# Allegro board democ2.brd
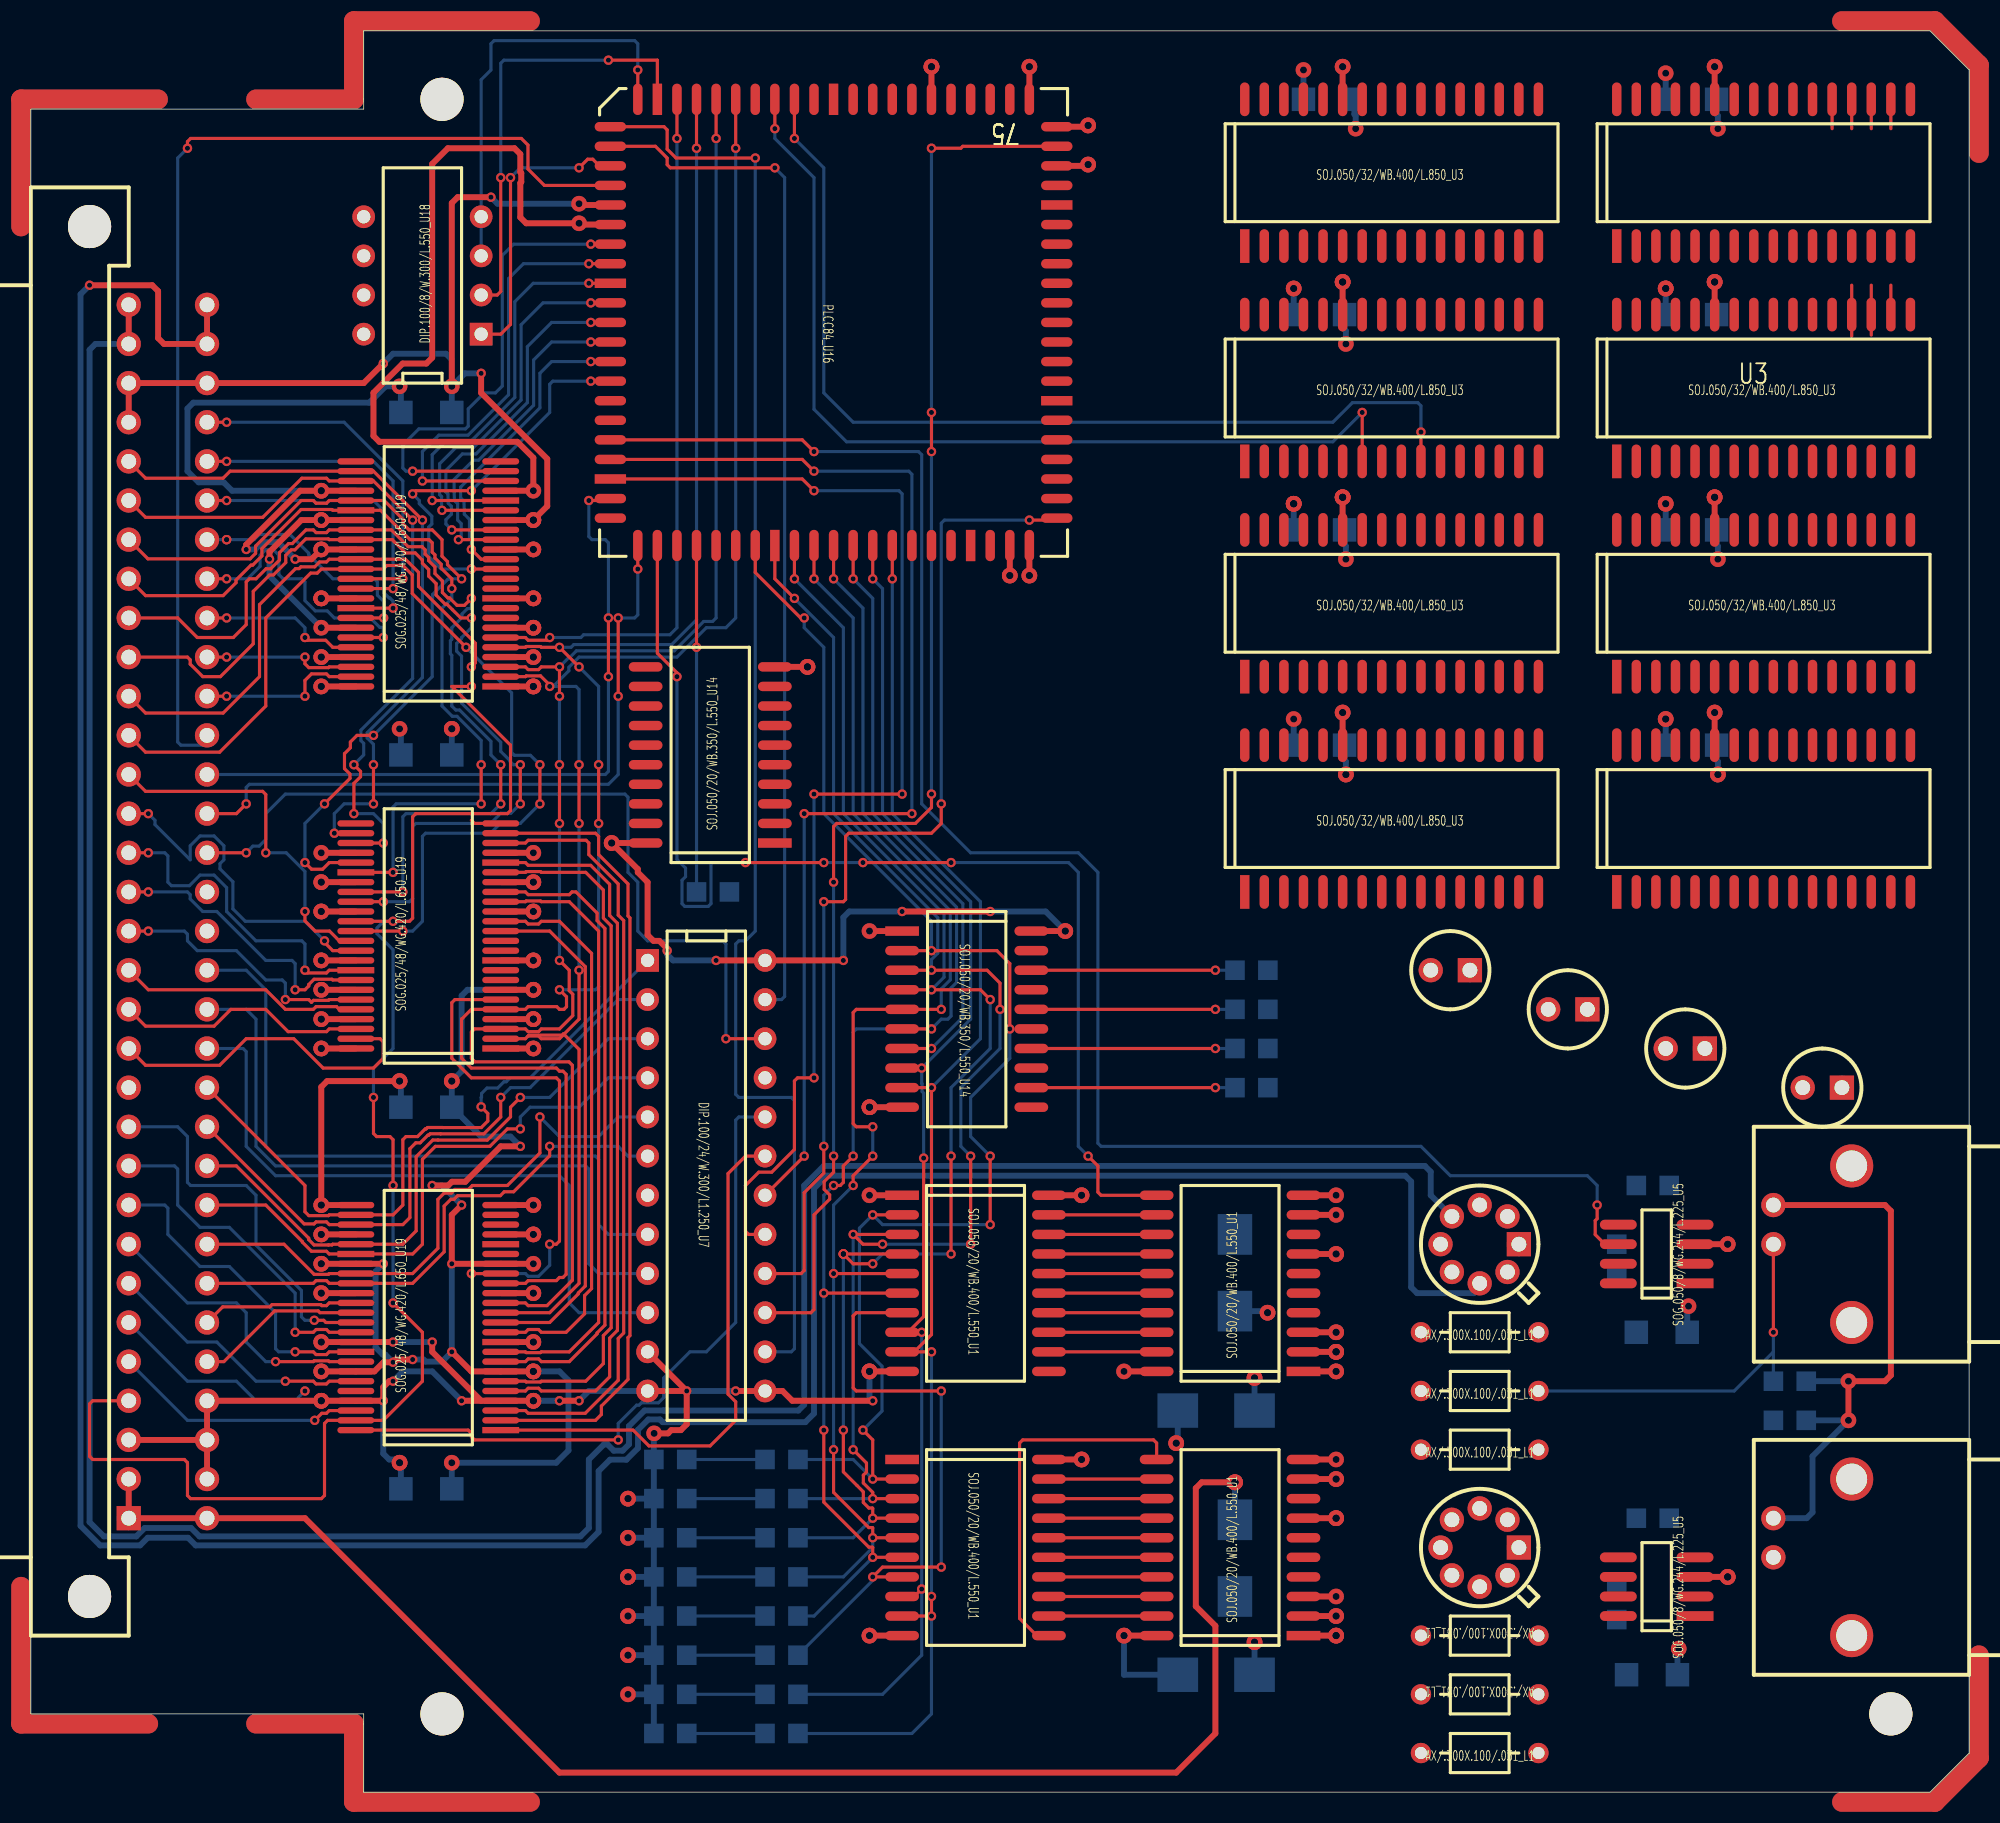
[diagram p0: board, top side]
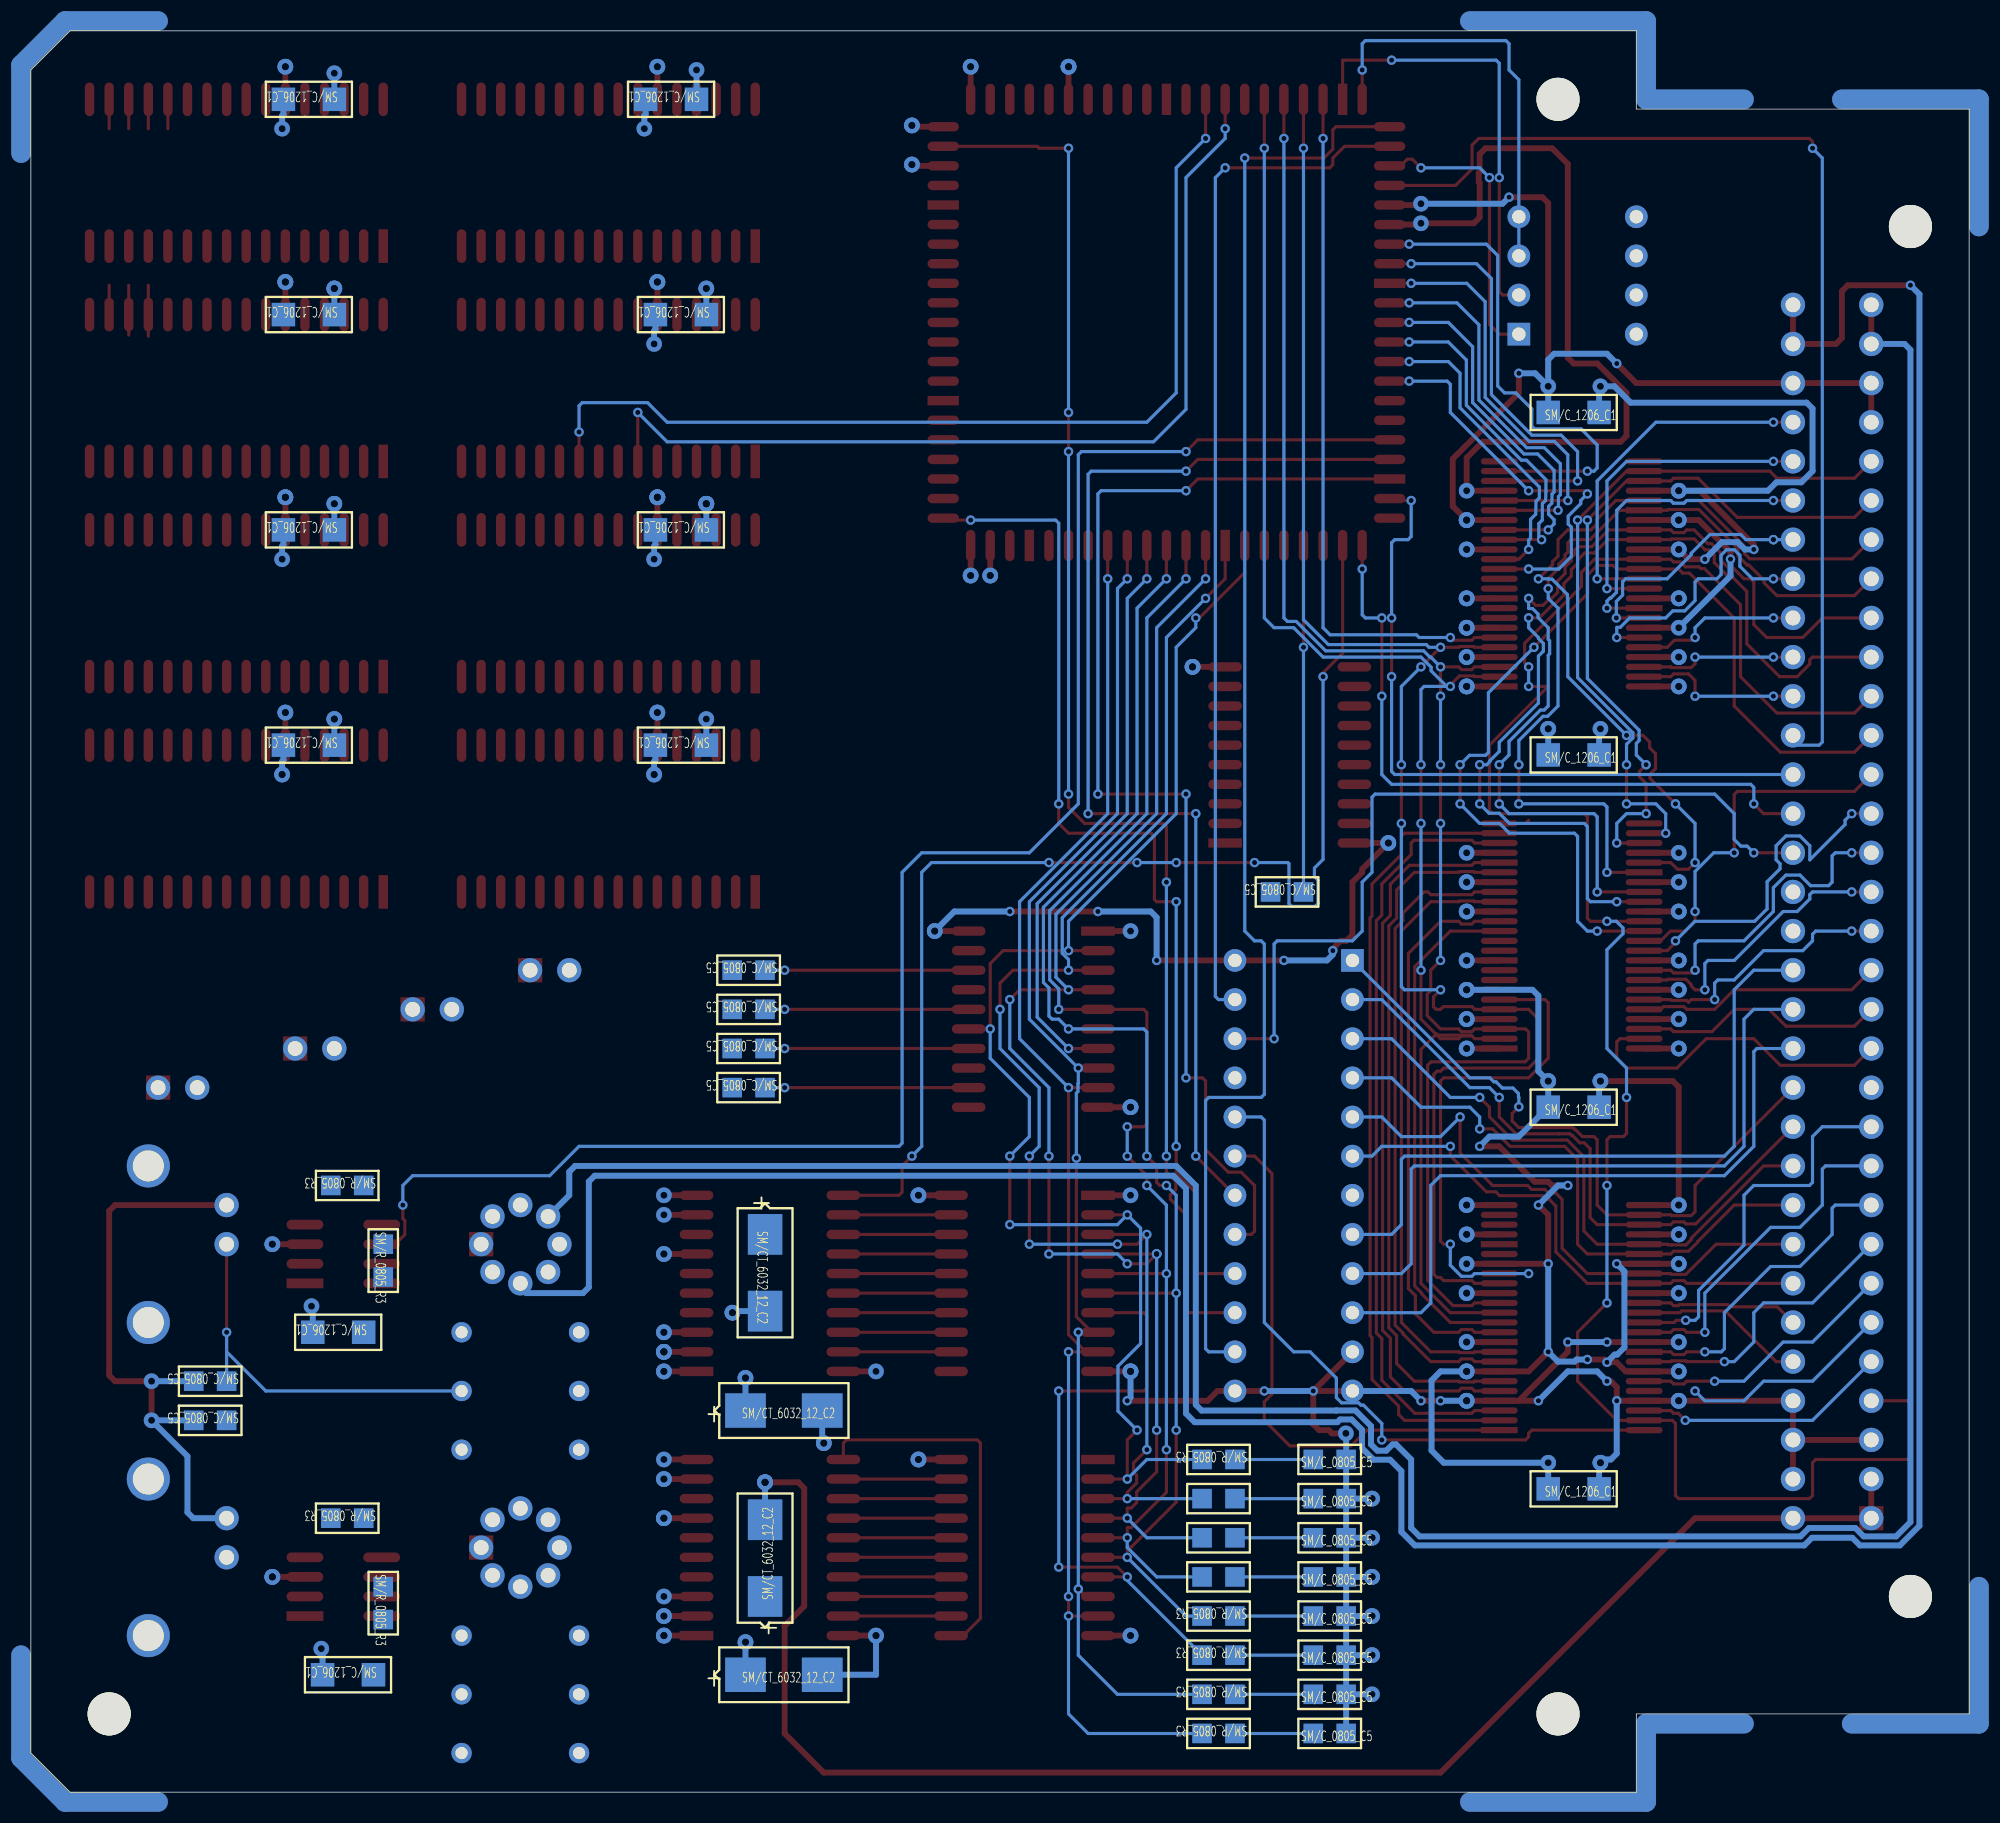
[diagram p1: board, bottom side, seen from below]

Outline 125.73 x 114.3 mm; copper layers: TOP, GND, POWER, BOTTOM. Coordinates in mm from the lower left corner of the outline.
Outline path: 0,109.22 21.59,109.22 21.59,114.3 123.19,114.3 125.73,111.76 125.73,2.54 123.19,0 21.59,0 21.59,5.08 0,5.08 0,109.22

## Design rules (mm)
nets with their own width: min track width 0.203; nets A0 A1 A2 A3 A4 A5 A6 A7 A8 A9 A10 A11 A12 A13 A14 A15 A16 A17 A18 A19 A20 A21 A22 A23 AEN/ BA0 BA1 BA2 BA3 BD0 BD1 BD2 BD3 BD4 BD5 BD6 BD7 BD8 BD9 BD10 BD11 BD12 BD13 BD14 BD15 BRD/ BRESET BWR/ D0 D1 D2 D3 D4 D5 D6 D7 D9 D10 D11 D12 D13 D14 D15 DDIR DEN/ DHEN/ FPGA/ GAIN HS/ MCLK MRD/ MWR/ N00036 N00036_6360 N00038 N00038_6372 N00044 N00044_6366 N00046 N00046_6362 N00048 N00048_6359 N00060 N00060_6368 N00306 N00318 N00322 N00671 N00689 N00703 N00717 N00827 N00831 N00835 N00837 N04966 N05690 N05692 N05694 N05696 N05698 N05700 N05702 N05704 N11940 N11950 N11984 N11994 N12004 N19706 N19710 N19714 N19718 N19934 N19938 N19942 N23417 N23878 N24816 N24821 N24826 N84247 N103899 N255822 N314771 N315146 N315333 N320476 N336036 N336041 OUTA OUTC RA0 RA1 RA2 RA3 RA4 RA5 RA6 RA7 RA8 RA9 RA10 RA11 RA12 RA13 RA14 RA15 RD0 RD1 RD2 RD3 RD4 RD5 RD6 RD7 RDY/ RESET/ SEL VCLKA VCLKC VD0 VD1 VD2 VD3 VD4 VD5 VD6 VD7 WAIT/ WSTAT/
nets with their own width: min track width 0.381; nets AGND GND GND_EARTH V12N V+12 VCC

## Placement (name value [footprint] x y rotation side)
C1  .1UF  [SMC1206]  104.14 29.84 0 bottom
C2  .1UF  [SMCT603212]  79.38 24.77 180 bottom
C3  .1UF  [SMCT603212]  79.38 7.62 180 bottom
C4  .1UF  [SMC1206]  106.05 109.86 0 bottom
C5  3300  [SMC0805]  42.55 6.35 180 bottom
C6  .1UF  [SMC1206]  103.51 7.62 0 bottom
C7  3300  [SMC0805]  42.55 21.59 180 bottom
C8  3300  [SMC0805]  42.55 8.89 180 bottom
C9  .1UF  [SMC1206]  27.3 89.53 180 bottom
C10  .1UF  [SMC1206]  27.3 67.31 180 bottom
C11  .1UF  [SMC1206]  27.3 44.45 180 bottom
C12  .1UF  [SMC1206]  106.05 81.91 0 bottom
C13  .1UF  [SMC1206]  106.05 95.89 0 bottom
C14  .1UF  [SMC1206]  106.05 67.95 0 bottom
C15  .1UF  [SMC1206]  27.3 19.69 180 bottom
C16  3300  [SMC0805]  42.55 11.43 180 bottom
C17  3300  [SMC0805]  42.55 13.97 180 bottom
C18  47PF  [SMC0805]  113.03 26.67 0 bottom
C19  3300  [SMC0805]  42.55 3.81 180 bottom
C20  3300  [SMC0805]  42.55 16.51 180 bottom
C21  .1UF  [SMCT603212]  78.11 12.7 90 bottom
C22  .1UF  [SMCT603212]  78.11 36.2 270 bottom
C23  47PF  [SMC0805]  113.03 24.13 0 bottom
C24  3300  [SMC0805]  42.55 19.05 180 bottom
C25  .1UF  [SMC1206]  82.55 109.86 0 bottom
C26  .1UF  [SMC1206]  81.92 95.89 0 bottom
C27  .1UF  [SMC1206]  81.92 81.91 0 bottom
C28  .1UF  [SMC1206]  81.92 67.95 0 bottom
D1  DIODE PHOTO EMIT  [LED]  100.97 50.8 180 top
D2  DIODE PHOTO EMIT  [LED]  93.34 53.34 180 top
D3  DIODE PHOTO EMIT  [LED]  108.59 48.26 180 top
D4  DIODE PHOTO EMIT  [LED]  117.48 45.72 180 top
J1  CON PAD  [DIN64P]  6.35 17.78 90 top
J2  CHANNEL 1  [BNC2P]  113.03 15.24 270 top
J3  CHANNEL 2  [BNC2P]  113.03 35.56 270 top
L1  50  [AX300X100031]  90.17 22.23 0 top
L2  50  [AX300X100031]  90.17 29.84 0 top
L3  50  [AX300X100031]  97.79 6.35 180 top
L4  50  [AX300X100031]  90.17 26.03 0 top
L5  50  [AX300X100031]  97.79 10.16 180 top
L6  50  [AX300X100031]  90.17 2.54 0 top
MTH1  -  [MTHOLE1]  26.67 109.86 0 top
MTH2  -  [MTHOLE1]  26.67 5.08 0 top
MTH3  -  [MTHOLE1]  120.65 5.08 0 top
R1  150  [SMC0805]  78.11 53.34 0 bottom
R2  150  [SMC0805]  78.11 50.8 0 bottom
R3  100  [SMR0805]  104.14 17.78 0 bottom
R4  100  [SMR0805]  102.87 13.34 270 bottom
R5  100  [SMR0805]  102.87 35.56 270 bottom
R6  100  [SMR0805]  104.14 39.37 0 bottom
R7  50  [SMR0805]  47.62 21.59 0 bottom
R8  50  [SMR0805]  47.62 8.89 0 bottom
R9  50  [SMR0805]  47.62 11.43 0 bottom
R10  50  [SMR0805]  47.62 6.35 0 bottom
R11  50  [SMC0805]  43.18 58.42 0 bottom
R12  150  [SMC0805]  78.11 45.72 0 bottom
R13  50  [SMR0805]  47.62 19.05 0 bottom
R14  50  [SMR0805]  47.62 16.51 0 bottom
R15  50  [SMR0805]  47.62 13.97 0 bottom
R16  50  [SMR0805]  47.62 3.81 0 bottom
R17  150  [SMC0805]  78.11 48.26 0 bottom
U1  TLC5602A  [SOJ05020WB400L550]  82.55 10.16 90 top
U2  TLC5602A  [SOJ05020WB400L550]  82.55 27.3 90 top
U3  TC55B4257J  [SOJ05032WB400L850]  102.87 86.36 0 top
U4  TC55B4257J  [SOJ05032WB400L850]  102.87 100.33 0 top
U5  DG419A  [SOG0508WG244L225]  107.95 33.02 90 top
U6  DG419A  [SOG0508WG244L225]  107.95 11.43 90 top
U7  20L10  [DIP10024W300L1250]  40 53.98 270 top
U8  TC55B4257J  [SOJ05032WB400L850]  78.74 72.39 0 top
U9  TC55B4257J  [SOJ05032WB400L850]  78.74 100.33 0 top
U10  TC55B4257J  [SOJ05032WB400L850]  102.87 72.39 0 top
U11  TC55B4257J  [SOJ05032WB400L850]  102.87 58.42 0 top
U12  TC55B4257J  [SOJ05032WB400L850]  78.74 58.42 0 top
U13  TC55B4257J  [SOJ05032WB400L850]  78.74 86.36 0 top
U14  ACT574  [SOJ05020WB350L550]  56.52 55.88 270 top
U15  ACT574  [SOJ05020WB400L550]  56.52 21.59 270 top
U16  EPF8282  [PLCC84]  52.07 109.86 270 top
U17  ACT574  [SOJ05020WB400L550]  56.52 38.73 270 top
U18  EPC1064  [DIP1008W300L550]  29.21 94.61 90 top
U19  FCT16245  [SOG02548WG420L650]  30.48 71.75 90 top
U20  FCT16245  [SOG02548WG420L650]  30.48 23.49 90 top
U21  FCT16245  [SOG02548WG420L650]  30.48 48.26 90 top
U22  TLE2037A  [TO-99]  96.52 35.56 90 top
U23  TLE2037A  [TO-99]  96.52 15.88 90 top
U25  74ACT574  [SOJ05020WB350L550]  48.26 61.59 90 top

## Library data of the parts
C1-C3 C5-C8 C16 C17 C19-C22 C24 = CAP: alternate symbols: (SMCT603212;SMC0805)
C4 C9-C15 C25-C28 = CAP_NP
C18 C23 = CAPACITOR
D1-D4 = DIODE_PHOTO_EMIT
J1 = 64CONSEPPINS
J2 J3 = BNC
L1-L6 = INDUCTOR
MTH1-MTH3 = MTHOLE1
R1-R17 = R: alternate symbols: (SMR0805)
U1 U2 = TLC5602A
U3 U4 U8-U13 = TC56B4257J
U5 U6 = DG419A
U7 = 20L10
U14 U15 U17 = ACT574: alternate symbols: (SOJ05020WB400L550)
U16 = FPGA_0
U18 = EPC1064
U19-U21 = FCT16245
U22 U23 = TLE2037A
U25 = 74ACT574

## Footprints (pads in the part's own frame, mm; a bottom-side part is the same pattern mirrored in y, then rotated)
AX300X100031
  round 1.321 hole 0.787: 1(0,0) 2(7.62,0)
BNC2P
  round 1.575 hole 0.965: 1(0,0) 2(-2.54,0)
  round 2.794 hole 2.007: 3(5.08,5.08) 4(-5.08,5.08)
DIN64P
  rect 1.575x1.575 hole 0.965: 1(0,0)
  round 1.575 hole 0.965: 2(2.54,0) 3(5.08,0) 4(7.62,0) 5(10.16,0) 6(12.7,0) 7(15.24,0) 8(17.78,0) 9(20.32,0) 10(22.86,0) 11(25.4,0) 12(27.94,0) 13(30.48,0) 14(33.02,0) 15(35.56,0) 16(38.1,0) 17(40.64,0) 18(43.18,0) 19(45.72,0) 20(48.26,0) 21(50.8,0) 22(53.34,0) 23(55.88,0) 24(58.42,0) 25(60.96,0) 26(63.5,0) 27(66.04,0) 28(68.58,0) 29(71.12,0) 30(73.66,0) 31(76.2,0) 32(78.74,0) 33(0,-5.08) 34(2.54,-5.08) 35(5.08,-5.08) 36(7.62,-5.08) 37(10.16,-5.08) 38(12.7,-5.08) 39(15.24,-5.08) 40(17.78,-5.08) 41(20.32,-5.08) 42(22.86,-5.08) 43(25.4,-5.08) 44(27.94,-5.08) 45(30.48,-5.08) 46(33.02,-5.08) 47(35.56,-5.08) 48(38.1,-5.08) 49(40.64,-5.08) 50(43.18,-5.08) 51(45.72,-5.08) 52(48.26,-5.08) 53(50.8,-5.08) 54(53.34,-5.08) 55(55.88,-5.08) 56(58.42,-5.08) 57(60.96,-5.08) 58(63.5,-5.08) 59(66.04,-5.08) 60(68.58,-5.08) 61(71.12,-5.08) 62(73.66,-5.08) 63(76.2,-5.08) 64(78.74,-5.08)
  round 2.794 hole 2.794: 65(83.82,2.54) 66(-5.08,2.54)
DIP1008W300L550
  rect 1.473x1.473 hole 0.864: 1(0,0)
  round 1.473 hole 0.864: 2(2.54,0) 3(5.08,0) 4(7.62,0) 5(7.62,7.62) 6(5.08,7.62) 7(2.54,7.62) 8(0,7.62)
DIP10024W300L1250
  rect 1.473x1.473 hole 0.864: 1(0,0)
  round 1.473 hole 0.864: 2(2.54,0) 3(5.08,0) 4(7.62,0) 5(10.16,0) 6(12.7,0) 7(15.24,0) 8(17.78,0) 9(20.32,0) 10(22.86,0) 11(25.4,0) 12(27.94,0) 13(27.94,7.62) 14(25.4,7.62) 15(22.86,7.62) 16(20.32,7.62) 17(17.78,7.62) 18(15.24,7.62) 19(12.7,7.62) 20(10.16,7.62) 21(7.62,7.62) 22(5.08,7.62) 23(2.54,7.62) 24(0,7.62)
LED
  rect 1.575x1.575 hole 0.965: 1(0,0)
  round 1.575 hole 0.965: 2(2.54,0)
MTHOLE1
  round 2.794 hole 2.794: 1(0,0)
PLCC84
  rect 2.032x0.61 smd: 1(0,0) 10(0,-11.43) 40(28.956,-3.81) 50(28.956,8.89)
  oval 2.032x0.61 smd: 2(0,-1.27) 3(0,-2.54) 4(0,-3.81) 5(0,-5.08) 6(0,-6.35) 7(0,-7.62) 8(0,-8.89) 9(0,-10.16) 11(0,-12.7) 33(28.956,-12.7) 34(28.956,-11.43) 35(28.956,-10.16) 36(28.956,-8.89) 37(28.956,-7.62) 38(28.956,-6.35) 39(28.956,-5.08) 41(28.956,-2.54) 42(28.956,-1.27) 43(28.956,0) 44(28.956,1.27) 45(28.956,2.54) 46(28.956,3.81) 47(28.956,5.08) 48(28.956,6.35) 49(28.956,7.62) 51(28.956,10.16) 52(28.956,11.43) 53(28.956,12.7) 75(0,12.7) 76(0,11.43) 77(0,10.16) 78(0,8.89) 79(0,7.62) 80(0,6.35) 81(0,5.08) 82(0,3.81) 83(0,2.54) 84(0,1.27)
  oval 0.61x2.032 smd: 12(1.778,-14.478) 13(3.048,-14.478) 14(4.318,-14.478) 15(5.588,-14.478) 16(6.858,-14.478) 17(8.128,-14.478) 18(9.398,-14.478) 19(10.668,-14.478) 21(13.208,-14.478) 22(14.478,-14.478) 23(15.748,-14.478) 24(17.018,-14.478) 25(18.288,-14.478) 26(19.558,-14.478) 27(20.828,-14.478) 28(22.098,-14.478) 29(23.368,-14.478) 31(25.908,-14.478) 32(27.178,-14.478) 54(27.178,14.478) 55(25.908,14.478) 56(24.638,14.478) 57(23.368,14.478) 58(22.098,14.478) 59(20.828,14.478) 61(18.288,14.478) 62(17.018,14.478) 63(15.748,14.478) 64(14.478,14.478) 65(13.208,14.478) 66(11.938,14.478) 67(10.668,14.478) 68(9.398,14.478) 69(8.128,14.478) 71(5.588,14.478) 72(4.318,14.478) 73(3.048,14.478) 74(1.778,14.478)
  rect 0.61x2.032 smd: 20(11.938,-14.478) 30(24.638,-14.478) 60(19.558,14.478) 70(6.858,14.478)
SMC0805
  rect 1.27x1.27 smd: 1(0,0) 2(2.134,0)
SMC1206
  rect 1.524x1.524 smd: 1(0,0) 2(3.302,0)
SMCT603212
  rect 2.642x2.235 smd: 1(0,0) 2(4.978,0)
SMR0805
  rect 1.27x1.27 smd: 1(0,0) 2(2.134,0)
SOG0508WG244L225
  rect 0.635x2.388 smd: 1(0,0)
  oval 0.635x2.388 smd: 2(1.27,0) 3(2.54,0) 4(3.81,0) 5(3.81,4.978) 6(2.54,4.978) 7(1.27,4.978) 8(0,4.978)
SOG02548WG420L650
  rect 0.406x2.388 smd: 1(0,0) 10(5.715,0) 20(12.065,0) 30(11.43,9.398) 40(5.08,9.398)
  oval 0.406x2.388 smd: 2(0.635,0) 3(1.27,0) 4(1.905,0) 5(2.54,0) 6(3.175,0) 7(3.81,0) 8(4.445,0) 9(5.08,0) 11(6.35,0) 12(6.985,0) 13(7.62,0) 14(8.255,0) 15(8.89,0) 16(9.525,0) 17(10.16,0) 18(10.795,0) 19(11.43,0) 21(12.7,0) 22(13.335,0) 23(13.97,0) 24(14.605,0) 25(14.605,9.398) 26(13.97,9.398) 27(13.335,9.398) 28(12.7,9.398) 29(12.065,9.398) 31(10.795,9.398) 32(10.16,9.398) 33(9.525,9.398) 34(8.89,9.398) 35(8.255,9.398) 36(7.62,9.398) 37(6.985,9.398) 38(6.35,9.398) 39(5.715,9.398) 41(4.445,9.398) 42(3.81,9.398) 43(3.175,9.398) 44(2.54,9.398) 45(1.905,9.398) 46(1.27,9.398) 47(0.635,9.398) 48(0,9.398)
SOJ05020WB350L550
  rect 0.61x2.184 smd: 1(0,0)
  oval 0.61x2.184 smd: 2(1.27,0) 3(2.54,0) 4(3.81,0) 5(5.08,0) 6(6.35,0) 7(7.62,0) 8(8.89,0) 9(10.16,0) 10(11.43,0) 11(11.43,8.382) 12(10.16,8.382) 13(8.89,8.382) 14(7.62,8.382) 15(6.35,8.382) 16(5.08,8.382) 17(3.81,8.382) 18(2.54,8.382) 19(1.27,8.382) 20(0,8.382)
SOJ05020WB400L550
  rect 0.61x2.184 smd: 1(0,0)
  oval 0.61x2.184 smd: 2(1.27,0) 3(2.54,0) 4(3.81,0) 5(5.08,0) 6(6.35,0) 7(7.62,0) 8(8.89,0) 9(10.16,0) 10(11.43,0) 11(11.43,9.525) 12(10.16,9.525) 13(8.89,9.525) 14(7.62,9.525) 15(6.35,9.525) 16(5.08,9.525) 17(3.81,9.525) 18(2.54,9.525) 19(1.27,9.525) 20(0,9.525)
SOJ05032WB400L850
  rect 0.61x2.184 smd: 1(0,0)
  oval 0.61x2.184 smd: 2(1.27,0) 3(2.54,0) 4(3.81,0) 5(5.08,0) 6(6.35,0) 7(7.62,0) 8(8.89,0) 9(10.16,0) 10(11.43,0) 11(12.7,0) 12(13.97,0) 13(15.24,0) 14(16.51,0) 15(17.78,0) 16(19.05,0) 17(19.05,9.525) 18(17.78,9.525) 19(16.51,9.525) 20(15.24,9.525) 21(13.97,9.525) 22(12.7,9.525) 23(11.43,9.525) 24(10.16,9.525) 25(8.89,9.525) 26(7.62,9.525) 27(6.35,9.525) 28(5.08,9.525) 29(3.81,9.525) 30(2.54,9.525) 31(1.27,9.525) 32(0,9.525)
TO-99
  rect 1.575x1.575 hole 0.965: 1(0,0)
  round 1.575 hole 0.965: 2(1.803,0.737) 3(2.54,2.54) 4(1.803,4.343) 5(0,5.08) 6(-1.803,4.343) 7(-2.54,2.54) 8(-1.803,0.737)

## Nets
AGND: C1.2(TP-2) C6.2(TP-2) C21.2(TP-2) C22.2(TP-2) J1.1(TP-1) J1.2(TP-2) J1.33(TP-33) U1.3(TP-3) U1.7(TP-7) U1.10(TP-10) U2.3(TP-3) U2.7(TP-7) U2.10(TP-10) U5.3(TP-3) U6.3(TP-3)
GND: C2.2(TP-2) C3.2(TP-2) C4.2(TP-2) C5.2(TP-2) C7.2(TP-2) C8.2(TP-2) C9.2(TP-2) C10.2(TP-2) C11.2(TP-2) C12.2(TP-2) C13.2(TP-2) C14.2(TP-2) C15.2(TP-2) C16.2(TP-2) C17.2(TP-2) C19.2(TP-2) C20.2(TP-2) C24.2(TP-2) C25.2(TP-2) C26.2(TP-2) C27.2(TP-2) C28.2(TP-2) J1.3(TP-3) J1.34(TP-34) J1.35(TP-35) J1.36(TP-36) U1.1(TP-1) U1.20(TP-20) U2.1(TP-1) U2.20(TP-20) U3.27(TP-27) U4.27(TP-27) U7.11(TP-11) U7.12(TP-12) U7.13(TP-13) U8.27(TP-27) U9.27(TP-27) U10.27(TP-27) U11.27(TP-27) U12.27(TP-27) U13.27(TP-27) U14.1(TP-1) U14.10(TP-10) U15.1(TP-1) U15.10(TP-10) U16.17(TP-17) U16.53(TP-53) U16.74(TP-74) U16.75(TP-75) U17.1(TP-1) U17.10(TP-10) U19.1(TP-1) U19.4(TP-4) U19.10(TP-10) U19.15(TP-15) U19.21(TP-21) U19.28(TP-28) U19.34(TP-34) U19.39(TP-39) U19.45(TP-45) U19.48(TP-48) U20.4(TP-4) U20.10(TP-10) U20.15(TP-15) U20.21(TP-21) U20.24(TP-24) U20.25(TP-25) U20.28(TP-28) U20.34(TP-34) U20.39(TP-39) U20.45(TP-45) U21.1(TP-1) U21.4(TP-4) U21.10(TP-10) U21.15(TP-15) U21.21(TP-21) U21.28(TP-28) U21.34(TP-34) U21.39(TP-39) U21.45(TP-45) U21.48(TP-48) U25.10(TP-10)
GND_EARTH: C18.2(TP-2) C23.2(TP-2) J2.2(TP-2) J3.2(TP-2)
V12N: J1.31(TP-31) J1.32(TP-32) U5.7(TP-7) U6.7(TP-7) U22.4(TP-4) U23.4(TP-4)
VCC: C2.1(TP-1) C3.1(TP-1) C4.1(TP-1) C9.1(TP-1) C10.1(TP-1) C11.1(TP-1) C12.1(TP-1) C13.1(TP-1) C14.1(TP-1) C15.1(TP-1) C25.1(TP-1) C26.1(TP-1) C27.1(TP-1) C28.1(TP-1) D1.1(TP-1) D2.1(TP-1) D3.1(TP-1) D4.1(TP-1) J1.29(TP-29) J1.30(TP-30) J1.62(TP-62) L2.1(TP-1) L6.1(TP-1) U1.2(TP-2) U1.9(TP-9) U2.2(TP-2) U2.9(TP-9) U7.24(TP-24) U14.20(TP-20) U15.20(TP-20) U16.16(TP-16) U16.52(TP-52) U16.72(TP-72) U16.80(TP-80) U17.20(TP-20) U19.7(TP-7) U19.18(TP-18) U19.31(TP-31) U19.42(TP-42) U20.7(TP-7) U20.18(TP-18) U20.31(TP-31) U20.42(TP-42) U21.7(TP-7) U21.18(TP-18) U21.31(TP-31) U21.42(TP-42) U25.20(TP-20)
A0: J1.54(TP-54) U19.47(TP-47)
A1: J1.55(TP-55) U19.46(TP-46)
A2: J1.56(TP-56) U19.44(TP-44)
A3: J1.57(TP-57) U19.43(TP-43)
A4: J1.58(TP-58) U19.41(TP-41)
A5: J1.59(TP-59) U19.40(TP-40)
A6: J1.60(TP-60) U19.38(TP-38)
A7: J1.61(TP-61) U19.37(TP-37)
A8: J1.13(TP-13) U21.47(TP-47)
A9: J1.14(TP-14) U21.46(TP-46)
A10: J1.15(TP-15) U21.44(TP-44)
A11: J1.16(TP-16) U21.43(TP-43)
A12: J1.17(TP-17) U21.41(TP-41)
A13: J1.18(TP-18) U21.40(TP-40)
A14: J1.19(TP-19) U21.38(TP-38)
A15: J1.20(TP-20) U21.37(TP-37)
A16: J1.37(TP-37) U20.36(TP-36)
A17: J1.38(TP-38) U20.35(TP-35)
A18: J1.39(TP-39) U7.6(TP-6) U20.33(TP-33)
A19: J1.40(TP-40) U7.5(TP-5) U20.32(TP-32)
A20: J1.41(TP-41) U7.4(TP-4) U20.30(TP-30)
A21: J1.42(TP-42) U7.3(TP-3) U20.29(TP-29)
A22: J1.43(TP-43) U7.2(TP-2) U20.27(TP-27)
A23: J1.44(TP-44) U7.1(TP-1) U20.26(TP-26)
AEN/: J1.47(TP-47) U7.8(TP-8)
BA0: U16.6(TP-6) U19.2(TP-2) U20.13(TP-13) U21.2(TP-2)
BA1: U16.7(TP-7) U19.3(TP-3) U20.14(TP-14) U21.3(TP-3)
BA2: U16.8(TP-8) U19.5(TP-5) U20.16(TP-16) U21.5(TP-5)
BA3: U16.9(TP-9) U19.6(TP-6) U20.17(TP-17) U21.6(TP-6)
BD0: U16.25(TP-25) U19.13(TP-13)
BD1: U16.24(TP-24) U19.14(TP-14)
BD2: U16.23(TP-23) U19.16(TP-16)
BD3: U16.22(TP-22) U19.17(TP-17)
BD4: U16.21(TP-21) U19.19(TP-19)
BD5: U16.20(TP-20) U19.20(TP-20)
BD6: U16.19(TP-19) U19.22(TP-22)
BD7: U16.18(TP-18) U19.23(TP-23)
BD8: U20.2(TP-2) U21.23(TP-23)
BD9: U20.3(TP-3) U21.22(TP-22)
BD10: U20.5(TP-5) U21.20(TP-20)
BD11: U20.6(TP-6) U21.19(TP-19)
BD12: U20.8(TP-8) U21.17(TP-17)
BD13: U20.9(TP-9) U21.16(TP-16)
BD14: U20.11(TP-11) U21.14(TP-14)
BD15: U20.12(TP-12) U21.13(TP-13)
BRD/: U7.15(TP-15) U16.73(TP-73)
BRESET: U7.14(TP-14) U16.12(TP-12)
BWR/: U7.16(TP-16) U16.54(TP-54)
D0: J1.28(TP-28) U19.26(TP-26) U21.26(TP-26)
D1: J1.27(TP-27) U19.27(TP-27) U21.27(TP-27)
D2: J1.26(TP-26) U19.29(TP-29) U21.29(TP-29)
D3: J1.25(TP-25) U19.30(TP-30) U21.30(TP-30)
D4: J1.24(TP-24) U19.32(TP-32) U21.32(TP-32)
D5: J1.23(TP-23) U19.33(TP-33) U21.33(TP-33)
D6: J1.4(TP-4) J1.22(TP-22) U19.35(TP-35) U20.47(TP-47) U21.35(TP-35)
D7: J1.21(TP-21) U19.36(TP-36) U21.36(TP-36)
D9: J1.5(TP-5) U20.46(TP-46)
D10: J1.6(TP-6) U20.44(TP-44)
D11: J1.7(TP-7) U20.43(TP-43)
D12: J1.8(TP-8) U20.41(TP-41)
D13: J1.9(TP-9) U20.40(TP-40)
D14: J1.10(TP-10) U20.38(TP-38)
D15: J1.11(TP-11) U20.37(TP-37)
DDIR: U7.19(TP-19) U19.24(TP-24) U20.1(TP-1) U21.24(TP-24)
DEN/: U7.20(TP-20) U19.25(TP-25) U20.48(TP-48)
DHEN/: U7.21(TP-21) U21.25(TP-25)
FPGA/: U7.17(TP-17) U16.30(TP-30)
GAIN: U5.6(TP-6) U6.6(TP-6) U16.28(TP-28)
HS/: U7.18(TP-18) U16.29(TP-29)
MCLK: J1.52(TP-52) U16.31(TP-31)
MRD/: J1.46(TP-46) U7.9(TP-9)
MWR/: J1.45(TP-45) U7.10(TP-10)
N00036_6360: L6.2(TP-2) R3.1(TP-1) R4.1(TP-1) U1.5(TP-5) U1.8(TP-8) U6.5(TP-5)
N00038_6372: C21.1(TP-1) L3.2(TP-2) U1.4(TP-4)
N00044_6366: U6.1(TP-1) U23.2(TP-2)
N00046_6362: R4.2(TP-2) U6.8(TP-8)
N00048_6359: R3.2(TP-2) U6.2(TP-2)
N00060_6368: U1.6(TP-6) U23.3(TP-3)
OUTA: L1.1(TP-1) U23.6(TP-6)
OUTC: L4.1(TP-1) U22.6(TP-6)
RA0: U3.5(TP-5) U4.5(TP-5) U8.5(TP-5) U9.5(TP-5) U10.5(TP-5) U11.5(TP-5) U12.5(TP-5) U13.5(TP-5) U16.58(TP-58)
RA1: U3.4(TP-4) U4.4(TP-4) U8.4(TP-4) U9.4(TP-4) U10.4(TP-4) U11.4(TP-4) U12.4(TP-4) U13.4(TP-4) U16.60(TP-60)
RA2: U3.3(TP-3) U4.3(TP-3) U8.3(TP-3) U9.3(TP-3) U10.3(TP-3) U11.3(TP-3) U12.3(TP-3) U13.3(TP-3) U16.61(TP-61)
RA3: U3.2(TP-2) U4.2(TP-2) U8.2(TP-2) U9.2(TP-2) U10.2(TP-2) U11.2(TP-2) U12.2(TP-2) U13.2(TP-2) U16.62(TP-62)
RA4: U3.32(TP-32) U4.32(TP-32) U8.32(TP-32) U9.32(TP-32) U10.32(TP-32) U11.32(TP-32) U12.32(TP-32) U13.32(TP-32) U16.63(TP-63)
RA5: U3.31(TP-31) U4.31(TP-31) U8.31(TP-31) U9.31(TP-31) U10.31(TP-31) U11.31(TP-31) U12.31(TP-31) U13.31(TP-31) U16.64(TP-64)
RA6: U3.30(TP-30) U4.30(TP-30) U8.30(TP-30) U9.30(TP-30) U10.30(TP-30) U11.30(TP-30) U12.30(TP-30) U13.30(TP-30) U16.65(TP-65)
RA7: U3.29(TP-29) U4.29(TP-29) U8.29(TP-29) U9.29(TP-29) U10.29(TP-29) U11.29(TP-29) U12.29(TP-29) U13.29(TP-29) U16.66(TP-66)
RA8: U3.28(TP-28) U4.28(TP-28) U8.28(TP-28) U9.28(TP-28) U10.28(TP-28) U11.28(TP-28) U12.28(TP-28) U13.28(TP-28) U16.67(TP-67)
RA9: U3.22(TP-22) U4.22(TP-22) U8.22(TP-22) U9.22(TP-22) U10.22(TP-22) U11.22(TP-22) U12.22(TP-22) U13.22(TP-22) U16.69(TP-69)
RA10: U3.21(TP-21) U4.21(TP-21) U8.21(TP-21) U9.21(TP-21) U10.21(TP-21) U11.21(TP-21) U12.21(TP-21) U13.21(TP-21) U16.70(TP-70)
RA11: U3.20(TP-20) U4.20(TP-20) U8.20(TP-20) U9.20(TP-20) U10.20(TP-20) U11.20(TP-20) U12.20(TP-20) U13.20(TP-20) U16.71(TP-71)
RA12: U3.19(TP-19) U4.19(TP-19) U8.19(TP-19) U9.19(TP-19) U10.19(TP-19) U11.19(TP-19) U12.19(TP-19) U13.19(TP-19) U16.76(TP-76)
RA13: U3.18(TP-18) U4.18(TP-18) U8.18(TP-18) U9.18(TP-18) U10.18(TP-18) U11.18(TP-18) U12.18(TP-18) U13.18(TP-18) U16.77(TP-77)
RA14: U3.15(TP-15) U4.15(TP-15) U8.15(TP-15) U9.15(TP-15) U10.15(TP-15) U11.15(TP-15) U12.15(TP-15) U13.15(TP-15) U16.78(TP-78)
RA15: U3.14(TP-14) U4.14(TP-14) U8.14(TP-14) U9.14(TP-14) U10.14(TP-14) U11.14(TP-14) U12.14(TP-14) U13.14(TP-14) U16.79(TP-79)
RD0: U4.26(TP-26) U8.26(TP-26) U9.26(TP-26) U10.26(TP-26) U16.81(TP-81)
RD1: U4.23(TP-23) U8.23(TP-23) U9.23(TP-23) U10.23(TP-23) U16.82(TP-82)
RD2: U4.10(TP-10) U8.10(TP-10) U9.10(TP-10) U10.10(TP-10) U16.83(TP-83)
RD3: U4.7(TP-7) U8.7(TP-7) U9.7(TP-7) U10.7(TP-7) U16.84(TP-84)
RD4: U3.26(TP-26) U11.26(TP-26) U12.26(TP-26) U13.26(TP-26) U16.1(TP-1)
RD5: U3.23(TP-23) U11.23(TP-23) U12.23(TP-23) U13.23(TP-23) U16.2(TP-2)
RD6: U3.10(TP-10) U11.10(TP-10) U12.10(TP-10) U13.10(TP-10) U16.3(TP-3)
RD7: U3.7(TP-7) U11.7(TP-7) U12.7(TP-7) U13.7(TP-7) U16.4(TP-4)
RDY/: J1.50(TP-50) U7.22(TP-22)
RESET/: J1.53(TP-53) U16.15(TP-15)
SEL: U7.23(TP-23) U16.13(TP-13)
V+12: C1.1(TP-1) C6.1(TP-1) J1.63(TP-63) J1.64(TP-64) U5.4(TP-4) U6.4(TP-4) U22.7(TP-7) U23.7(TP-7)
VCLKA: U1.11(TP-11) U2.11(TP-11) U15.11(TP-11) U16.34(TP-34)
VCLKC: R11.2(TP-2) U17.11(TP-11)
VD0: R7.2(TP-2) U14.2(TP-2) U15.2(TP-2) U16.39(TP-39) U17.2(TP-2)
VD1: R13.2(TP-2) U14.3(TP-3) U15.3(TP-3) U16.40(TP-40) U17.3(TP-3)
VD2: R14.2(TP-2) U14.4(TP-4) U15.4(TP-4) U16.41(TP-41) U17.4(TP-4)
VD3: R15.2(TP-2) U14.5(TP-5) U15.5(TP-5) U16.42(TP-42) U17.5(TP-5)
VD4: R9.2(TP-2) U14.6(TP-6) U15.6(TP-6) U16.43(TP-43) U17.6(TP-6)
VD5: R8.2(TP-2) U14.7(TP-7) U15.7(TP-7) U16.44(TP-44) U17.7(TP-7)
VD6: R10.2(TP-2) U14.8(TP-8) U15.8(TP-8) U16.45(TP-45) U17.8(TP-8)
VD7: R16.2(TP-2) U14.9(TP-9) U15.9(TP-9) U16.46(TP-46) U17.9(TP-9)
WAIT/: J1.51(TP-51) U16.33(TP-33)
WSTAT/: U14.11(TP-11) U16.56(TP-56)
N00036: L2.2(TP-2) R5.1(TP-1) R6.1(TP-1) U2.5(TP-5) U2.8(TP-8) U5.5(TP-5)
N00038: C22.1(TP-1) L5.2(TP-2) U2.4(TP-4)
N00044: U5.1(TP-1) U22.2(TP-2)
N00046: R5.2(TP-2) U5.8(TP-8)
N00048: R6.2(TP-2) U5.2(TP-2)
N00060: U2.6(TP-6) U22.3(TP-3)
N00306: U1.12(TP-12) U15.19(TP-19)
N00318: U1.15(TP-15) U15.16(TP-16)
N00322: U1.16(TP-16) U15.15(TP-15)
N00671: C19.1(TP-1) R16.1(TP-1)
N00689: C5.1(TP-1) R10.1(TP-1)
N00703: C8.1(TP-1) R8.1(TP-1)
N00717: C16.1(TP-1) R9.1(TP-1)
N00827: C17.1(TP-1) R15.1(TP-1)
N00831: C20.1(TP-1) R14.1(TP-1)
N00835: C24.1(TP-1) R13.1(TP-1)
N00837: C7.1(TP-1) R7.1(TP-1)
N04966: L3.1(TP-1) L5.1(TP-1)
N05690: U2.12(TP-12) U17.19(TP-19)
N05692: U2.18(TP-18) U17.13(TP-13)
N05694: U2.13(TP-13) U17.18(TP-18)
N05696: U2.19(TP-19) U17.12(TP-12)
N05698: U2.17(TP-17) U17.14(TP-14)
N05700: U2.14(TP-14) U17.17(TP-17)
N05702: U2.15(TP-15) U17.16(TP-16)
N05704: U2.16(TP-16) U17.15(TP-15)
N11940: U1.13(TP-13) U15.18(TP-18)
N11950: U1.14(TP-14) U15.17(TP-17)
N11984: U1.17(TP-17) U15.14(TP-14)
N11994: U1.18(TP-18) U15.13(TP-13)
N12004: U1.19(TP-19) U15.12(TP-12)
N19706: R1.1(TP-1) U14.18(TP-18)
N19710: R2.1(TP-1) U14.16(TP-16)
N19714: R17.1(TP-1) U14.14(TP-14)
N19718: R12.1(TP-1) U14.12(TP-12)
N19934: D4.2(TP-2) R12.2(TP-2)
N19938: D3.2(TP-2) R17.2(TP-2)
N19942: D1.2(TP-2) R2.2(TP-2)
N23417: U10.6(TP-6) U13.6(TP-6) U16.48(TP-48)
N23878: R11.1(TP-1) U16.36(TP-36)
N24816: U16.14(TP-14) U18.1(TP-1)
N24821: U16.10(TP-10) U18.2(TP-2)
N24826: U16.11(TP-11) U18.3(TP-3) U18.4(TP-4)
N84247: U19.9(TP-9) U20.22(TP-22) U21.9(TP-9) U21.12(TP-12)
N103899: U19.8(TP-8) U19.12(TP-12) U20.19(TP-19) U20.23(TP-23) U21.8(TP-8) U21.11(TP-11)
N255822: D2.2(TP-2) R1.2(TP-2)
N314771: U3.6(TP-6) U4.6(TP-6) U16.51(TP-51)
N315146: U9.6(TP-6) U11.6(TP-6) U16.50(TP-50)
N315333: U8.6(TP-6) U12.6(TP-6) U16.49(TP-49)
N320476: U3.11(TP-11) U4.11(TP-11) U8.11(TP-11) U9.11(TP-11) U10.11(TP-11) U11.11(TP-11) U12.11(TP-11) U13.11(TP-11) U16.57(TP-57)
N336036: C23.1(TP-1) J2.1(TP-1) L1.2(TP-2)
N336041: C18.1(TP-1) J3.1(TP-1) L4.2(TP-2)

Pads without a net: J1 12 48 49 65 66; J2 3 4; J3 3 4; MTH1 1; MTH2 1; MTH3 1; U3 1 8 9 12 13 16 17 24 25; U4 1 8 9 12 13 16 17 24 25; U7 7; U8 1 8 9 12 13 16 17 24 25; U9 1 8 9 12 13 16 17 24 25; U10 1 8 9 12 13 16 17 24 25; U11 1 8 9 12 13 16 17 24 25; U12 1 8 9 12 13 16 17 24 25; U13 1 8 9 12 13 16 17 24 25; U14 13 15 17 19; U16 5 26 27 32 35 37 38 47 55 59 68; U18 5 6 7 8; U19 11; U20 20; U22 1 5 8; U23 1 5 8; U25 1 2 3 4 5 6 7 8 9 11 12 13 14 15 16 17 18 19

## Via types
v1: diameter 0.61, hole 0.33, TOP to BOTTOM, 257 vias
v2: diameter 1.016, hole 0.457, TOP to BOTTOM, 245 vias

## Routing (per net, layer and track width the routed paths; a pad name or vN(x,y) marks a point on that pad's centre or on a via; arc(x,y) is an arc through that point)
AGND: length 125
  TOP w0.381: v2(78.11,20.11) 75.95,20.11 75.56,19.73 75.56,12.07 76.84,10.79 76.84,3.81 74.3,1.27 34.29,1.27 17.78,17.78 J1.33 J1.1 J1.2 ; U2.3 v2(84.67,29.84) ; v2(84.67,21.59) U1.10 ; v2(110.07,35.56) U5.3 ; 82.55,34.92 v2(84.67,34.92) ; U1.3 v2(84.67,12.7) ; v2(84.67,17.78) U1.7 ; U6.3 v2(110.07,13.97) ; v2(84.67,38.73) U2.10
  BOTTOM w0.381: v2(80.22,31.12) 80.12,31.22 C22.2 ; v2(106.89,9.31) 106.81,9.23 C6.2 ; C21.2 v2(78.11,20.11) ; v2(107.53,31.54) 107.44,31.45 C1.2
GND: length 347
  TOP w0.381: U20.10 v2(32.6,29.21) ; U21.1 v2(32.6,48.26) ; v1(42.55,26.03) U7.12 ; v1(42.55,26.03) U7.11 ; v1(42.55,26.03) 42.55,23.88 42.16,23.49 41.54,23.49 41.33,23.28 v2(40.43,23.28) ; v2(18.84,29.21) U20.39 v1(23.49,29.21) ; 29.21,25.4 v1(27.94,25.4) ; 29.21,25.4 U20.4 v2(32.6,25.4) ; 29.21,25.4 26.04,28.58 v1(26.04,29.21) ; v2(50.38,73.02) U25.10 ; v2(18.84,73.66) U19.45 ; U19.1 v2(32.6,71.75) ; v2(18.84,71.75) U19.48 ; U13.27 v2(85.09,98) ; U14.10 v2(54.4,44.45) ; U16.75 v2(64.77,111.97) ; U10.27 v2(109.22,84.03) ; U21.28 v2(18.84,60.96) ; v2(32.6,77.47) U19.10 ; v2(84.67,27.3) U2.1 ; U20.28 v2(18.84,36.2) ; U20.21 v2(32.6,36.2) ; v2(85.09,111.97) U9.27 ; U14.1 v2(54.4,55.88) ; v1(13.97,80.64) 13.97,80.95 17.47,84.45 v2(18.84,84.45) U19.28 ; v2(68.58,108.16) 68.5,108.08 U16.74 ; v2(109.22,111.97) U4.27 ; v1(34.29,25.4) v1(35.56,25.4) ; v2(32.6,50.16) U21.4 ; v1(54.61,25.4) 49.39,25.4 48.76,26.03 U7.13 v1(45.72,26.03) ; v2(32.6,73.66) U19.4 ; U1.1 v2(84.67,10.16) ; v2(32.6,53.98) 30.48,53.98 ; v2(109.22,70.06) U11.27 ; U19.21 v2(32.6,84.45) 32.6,86.59 31.56,87.63 22.61,87.63 22.23,88.01 22.23,90.81 24.12,92.71 25.65,92.71 26.04,93.09 26.04,105.66 27.05,106.68 31.37,106.68 31.75,106.3 31.75,105.13 31.81,105.06 31.81,104.49 31.75,104.42 31.75,102.19 32.13,101.81 v2(35.56,101.81) 35.64,101.73 U16.17 ; v2(64.77,78.95) U16.53 ; U19.34 v2(18.84,80.64) 18.2,80.01 v1(17.14,80.01) ; v1(23.49,26.67) 23.24,26.67 22.86,26.29 v1(22.86,25.4) U20.45 v2(18.84,25.4) J1.36 J1.35 ; v2(32.6,80.64) U19.15 ; v2(23.92,46.14) 19.22,46.14 18.84,45.76 v2(18.84,38.1) U20.25 ; v2(32.6,60.96) U21.21 ; v2(32.6,57.15) U21.15 ; J1.34 J1.35 ; J1.35 J1.3 ; U20.15 v2(32.6,32.38) ; U19.39 v2(18.84,77.47) ; v2(70.91,10.16) U1.20 ; 21.08,53.98 v2(18.84,53.98) ; v2(109.22,98) U3.27 ; U20.34 v2(18.84,32.38) ; v2(85.09,84.03) U8.27 ; U12.27 v2(85.09,70.06) ; U21.48 v2(18.84,48.26) ; v2(54.4,38.73) U17.1 ; v2(54.4,27.3) U17.10 ; U20.24 v2(32.6,38.1) ; U2.20 v2(70.91,27.3) ; v2(18.84,50.16) U21.45 ; U21.34 v2(18.84,57.15) ; v2(54.4,10.16) U15.10
  BOTTOM w0.381: C25.2 85.85,108.89 85.94,108.8 v2(85.94,107.95) ; C2.2 74.4,22.75 v2(74.3,22.65) ; 85.22,95.89 85.22,94.92 85.3,94.83 v2(85.3,93.98) ; v1(54.61,25.4) 54.4,25.61 v2(54.4,27.3) ; v2(18.84,84.45) 13.05,84.45 12.51,85 10.88,85 10.16,85.72 10.16,89.79 10.54,90.17 21.96,90.17 23.01,91.23 v2(23.92,91.23) 24,91.14 C9.2 ; C17.2 C16.2 ; C17.2 C20.2 ; C17.2 v2(38.73,13.97) ; C16.2 v2(38.73,11.43) ; C16.2 C8.2 ; C8.2 v2(38.73,8.89) ; C8.2 C5.2 ; v2(109.43,80.01) 109.43,80.86 109.35,80.95 C12.2 ; C11.2 24,46.06 v2(23.92,46.14) ; C15.2 24,21.29 v2(23.92,21.38) 23.71,21.59 23.24,21.59 22.86,21.97 v1(22.86,25.4) ; v2(85.3,66.04) 85.3,66.89 85.22,66.98 85.22,67.95 ; U7.12 36.2,26.03 v1(35.56,25.4) ; 85.22,81.91 85.22,80.95 85.3,80.86 v2(85.3,80.01) ; C5.2 v2(38.73,6.35) ; C5.2 C19.2 ; C20.2 v2(38.73,16.51) ; C20.2 C24.2 ; v1(45.72,26.03) v1(42.55,26.03) ; v2(109.43,107.95) 109.43,108.8 109.35,108.89 C4.2 ; C24.2 v2(38.73,19.05) ; C24.2 C7.2 40.41,23.27 v2(40.43,23.28) ; v1(27.94,25.4) 26.04,27.3 24.13,27.3 v1(23.49,26.67) ; C10.2 24,68.92 v2(23.92,69) ; v2(32.6,25.4) v1(34.29,25.4) ; v2(109.43,66.04) 109.43,66.89 109.35,66.98 C14.2 ; v2(70.91,10.16) 70.91,7.62 C3.2 ; v1(26.04,29.21) v1(23.49,29.21) ; v1(13.97,80.64) 14.55,80.64 15.02,81.12 16.04,81.12 v1(17.14,80.01)
GND_EARTH: length 39
  TOP w0.381: v2(117.9,24.13) v2(117.9,26.67) 120.27,26.67 120.65,27.05 120.65,37.72 120.27,38.1 J3.2
  BOTTOM w0.381: J2.2 115.19,17.78 115.57,18.16 115.57,21.8 v2(117.9,24.13) C23.2 ; C18.2 v2(117.9,26.67)
V12N: length 194.7
  TOP w0.381: J1.32 J1.31
  BOTTOM w0.381: U22.4 90.81,38.73 90.81,40.26 90.42,40.64 51.44,40.64 50.17,39.37 50.17,25.15 49.78,24.77 41.05,24.77 41.05,24.77 39.81,24.77 38.8,23.76 38.8,23.27 38.8,23.27 38.8,22.57 38.39,22.16 37.81,22.16 37.4,22.57 37.18,22.57 36.2,21.59 36.2,17.14 35.65,16.6 10.94,16.6 10.39,17.14 7.39,17.14 6.84,16.6 4.74,16.6 3.81,17.53 3.81,93.6 4.19,93.98 J1.31
VCC: length 258.5
  TOP w0.381: v1(41.27,54.61) 41.27,54.74 40.77,55.24 40.39,55.24 40,55.63 40,59.05 39.37,59.69 39.37,59.9 v2(37.68,61.59) U25.20 ; U21.7 v2(32.6,52.07) ; v2(35.56,103.08) 35.64,103 U16.16 ; U15.20 v2(68.16,21.59) ; v1(29.84,103.5) 27.69,103.5 27.3,103.12 v2(27.3,91.23) ; J1.29 J1.30 J1.62 21.59,91.44 v1(22.86,92.71) ; v1(22.86,34.29) U20.31 v2(18.84,34.29) ; v2(32.6,34.29) U20.18 v1(27.3,34.29) 27.3,37.46 v1(27.94,38.1) ; v2(18.84,75.56) U19.42 ; v1(26.04,39.37) 27.07,39.37 27.31,39.61 28.18,39.61 30.48,41.91 v1(31.75,41.91) ; v2(58.42,111.97) U16.80 ; U19.31 v2(18.84,82.55) 17.54,82.55 15.48,80.49 v1(15.48,80.02) ; v2(18.84,27.3) U20.42 22.28,27.3 22.88,27.9 v1(23.49,27.9) 23.67,28.08 v1(24.77,28.08) ; v2(68.58,105.62) 68.5,105.54 66.55,105.54 ; U21.31 v2(18.84,59.05) ; v2(63.5,78.95) U16.52 ; U21.18 v2(32.6,59.05) ; U19.18 v2(32.6,82.55) 33.5,83.45 33.5,86.52 29.21,90.8 v1(29.21,92.08) ; U1.2 v2(84.67,11.43) ; v1(27.3,28.58) 28.57,27.3 U20.7 v2(32.6,27.3) ; U19.7 v2(32.6,75.56) ; v1(56.52,57.15) v1(62.23,57.15) ; U14.20 v2(67.1,55.88) ; v2(84.67,20.32) U1.9 ; v1(44.45,53.98) U7.24 v1(52.7,53.98) ; U17.20 v2(68.16,38.73) ; v2(18.84,52.07) U21.42 ; v2(84.67,37.46) 82.55,37.46 ; U2.2 v2(84.67,28.58)
  BOTTOM w0.381: v1(27.94,38.1) 26.67,39.37 v1(26.04,39.37) ; v2(35.56,103.08) 30.27,103.08 v1(29.84,103.5) ; v1(22.86,34.29) 22.36,33.79 22.36,28.86 22.83,28.4 23,28.4 v1(23.49,27.9) ; v1(15.48,80.02) 15.48,78.92 v2(18.84,75.56) ; v1(22.86,92.71) 23.49,93.34 26.92,93.34 27.3,92.96 v2(27.3,91.23) ; v2(82.55,111.76) C25.1 ; v2(106.05,111.55) C4.1 ; v2(79.38,26.88) C2.1 ; v1(29.21,92.08) 28.15,92.08 v2(27.3,91.23) ; v2(32.6,27.3) 34.29,27.3 34.87,26.72 34.87,22.17 34.08,21.38 v2(27.3,21.38) C15.1 ; v2(27.3,91.23) C9.1 ; v2(106.05,83.61) C12.1 ; C26.1 v2(81.92,97.58) ; v1(27.3,34.29) v1(27.3,28.58) 26.67,27.94 25.6,27.94 25.47,28.08 v1(24.77,28.08) ; v2(67.1,55.88) 65.83,57.15 v1(62.23,57.15) ; C3.1 v2(79.38,9.74) ; v1(56.52,57.15) 53.09,57.15 52.7,56.77 v1(52.7,53.98) ; v2(106.05,97.58) C13.1 ; v2(27.3,69) C10.1 ; v1(41.27,54.61) 41.27,54.36 41.66,53.98 v1(44.45,53.98) ; v2(81.92,83.61) C27.1 ; v1(31.75,41.91) 31.11,42.55 29.21,42.55 C11.1 v2(27.3,46.14) 27.95,46.78 27.95,51.69 28.33,52.07 v2(32.6,52.07) ; C14.1 v2(106.05,69.64) ; C28.1 v2(81.92,69.64)
A0: length 10.9
  TOP w0.203: U19.47 19.35,72.39 19.18,72.57 18.2,72.57 17.78,72.14 v1(17.78,71.12) ; J1.54 v1(12.7,71.12)
  BOTTOM w0.203: v1(12.7,71.12) v1(17.78,71.12)
A1: length 10.2
  TOP w0.203: v1(17.78,73.66) 17.78,73.23 18.03,72.97 19.3,72.97 19.35,73.02 U19.46 ; J1.55 v1(12.7,73.66)
  BOTTOM w0.203: v1(12.7,73.66) v1(17.78,73.66)
A2: length 10.8
  TOP w0.203: U19.44 19.58,74.3 19.13,74.75 17.96,74.75 v1(17.78,74.93) ; J1.56 v1(12.7,76.2)
  BOTTOM w0.203: v1(17.78,74.93) 17.78,75.56 17.14,76.2 v1(12.7,76.2)
A3: length 18.6
  TOP w0.203: v1(22.86,74.93) U19.43 ; J1.57 v1(12.7,78.74)
  BOTTOM w0.203: v1(22.86,74.93) 22.86,75.56 22.83,75.59 22.63,75.59 22.02,76.2 19.68,76.2 19.23,76.66 18.45,76.66 17.78,77.33 17.78,78.54 17.58,78.74 16.37,78.74 16.09,79.01 16.09,80.27 15.74,80.62 15.23,80.62 14.87,80.27 14.87,79.55 14.06,78.74 v1(12.7,78.74)
A4: length 16.8
  TOP w0.203: v1(22.89,76.2) U19.41
  BOTTOM w0.203: v1(22.89,76.2) 22.89,77.27 22.48,77.68 22.48,78.54 22.28,78.74 19.59,78.74 18.03,80.31 18.03,80.4 16.81,81.62 14.82,81.62 14.48,81.28 v1(12.7,81.28) J1.58
A5: length 20.9
  TOP w0.203: J1.59 v1(12.7,83.82) ; v1(23.49,76.83) U19.40
  BOTTOM w0.203: v1(12.7,83.82) 18.32,83.82 18.5,83.64 19.18,83.64 19.35,83.82 22.23,83.82 22.86,83.19 22.86,78.74 22.89,78.71 22.89,77.85 23.24,77.5 23.29,77.5 23.49,77.29 v1(23.49,76.83)
A6: length 22
  TOP w0.203: J1.60 v1(12.7,86.36) ; v1(23.49,78.11) U19.38
  BOTTOM w0.203: v1(12.7,86.36) 22.23,86.36 23.49,85.09 v1(23.49,78.11)
A7: length 23.7
  TOP w0.203: J1.61 v1(12.7,88.9) ; v1(24.13,78.74) U19.37
  BOTTOM w0.203: v1(12.7,88.9) 20.32,88.9 24.13,85.09 v1(24.13,78.74)
A8: length 21.7
  TOP w0.203: J1.13 7.44,47.17 12.24,47.17 13.97,48.89 17.05,48.89 18.96,46.99 22.23,46.99 22.86,47.62 22.86,48.69 22.66,48.89 U21.47
A9: length 16.3
  TOP w0.203: J1.14 7.44,49.71 11.88,49.71 12.98,50.8 15.24,50.8 16.69,49.35 19.18,49.35 19.35,49.53 U21.46
A10: length 15.9
  TOP w0.203: J1.15 7.62,52.07 15.24,52.07 16.51,50.8 18.32,50.8 18.5,50.98 19.83,50.98 20.01,50.8 U21.44
A11: length 17.6
  TOP w0.203: v1(16.51,51.43) 18.03,51.43 18.2,51.26 18.33,51.38 19.3,51.38 19.35,51.43 U21.43 ; v1(7.62,55.88) J1.16
  BOTTOM w0.203: v1(7.62,55.88) 9.96,55.88 10.16,55.68 10.16,55.24 10.79,54.61 13.33,54.61 15.24,52.7 16.31,52.7 16.51,52.5 v1(16.51,51.43)
A12: length 18.9
  TOP w0.203: J1.17 v1(7.62,58.42) ; v1(17.14,52.07) 17.78,52.07 18.03,52.32 18.03,52.41 18.37,52.76 19.53,52.76 19.58,52.7 U21.41
  BOTTOM w0.203: v1(17.14,52.07) 17.14,53.77 16.94,53.98 15.24,53.98 12.06,57.15 11.15,57.15 10.34,57.97 10.34,58.24 10.16,58.42 v1(7.62,58.42)
A13: length 21.5
  TOP w0.203: v1(17.78,53.34) 17.96,53.16 19.18,53.16 19.35,53.34 U21.40 ; v1(7.62,60.96) J1.18
  BOTTOM w0.203: v1(7.62,60.96) 8.69,60.96 8.89,60.76 8.89,59.05 9.12,58.83 10.29,58.83 10.98,59.51 11.88,59.51 12.7,58.7 12.7,57.15 14.6,55.24 17.58,55.24 17.78,55.04 v1(17.78,53.34)
A14: length 22.8
  TOP w0.203: J1.19 v1(7.62,63.5) ; 19,55.19 19.05,55.14 ; 19.05,55.14 v1(19.05,55.24) ; 19.05,55.14 19.58,54.61 U21.38
  BOTTOM w0.203: v1(7.62,63.5) 8.05,63.07 8.05,62.79 10.34,60.51 10.34,61.41 10.98,62.05 11.88,62.05 12.52,61.41 12.52,60.51 12.27,60.25 12.27,59.92 13.11,59.08 13.11,57.32 13.91,56.52 17.78,56.52 v1(19.05,55.24)
A15: length 23.3
  TOP w0.203: J1.20 7.44,64.95 15.04,64.95 15.24,64.74 v1(15.24,60.96) ; v1(17.78,57.15) 17.78,56.54 18.44,55.88 19.37,55.88 20.01,55.24 U21.37
  BOTTOM w0.203: v1(15.24,60.96) 16.57,60.96 17.78,59.75 v1(17.78,57.15)
A16: length 11.1
  TOP w0.203: U20.36 18.76,31.12 18.64,31.23 15.81,31.23 12.52,27.94 J1.37
A17: length 10.2
  TOP w0.203: J1.38 12.45,31.5 15.5,31.5 15.64,31.64 18.81,31.64 18.88,31.57 19.18,31.57 19.35,31.75 U20.35
A18: length 34.8
  TOP w0.203: v1(33.66,41.91) 33.66,41.3 31.32,38.96 30.71,38.96 30.45,38.71 27.69,38.71 27.44,38.47 27.24,38.47 26.81,38.04 26.81,35.06 24.77,33.02 U20.33 19.35,33.02 19.18,33.2 18.5,33.2 18.32,33.02 J1.39
  BOTTOM w0.203: U7.6 38.73,41.27 38.1,41.91 v1(33.66,41.91)
A19: length 37.9
  TOP w0.203: J1.40 16.42,35.56 18.37,33.6 19.3,33.6 19.35,33.66 U20.32 24.77,33.66 26.4,35.29 26.4,38.47 26.81,38.87 27.27,38.87 27.52,39.12 28.39,39.12 28.64,39.37 30.91,39.37 33.02,41.48 v1(33.02,43.81)
  BOTTOM w0.203: v1(33.02,43.81) 34.29,42.55 36.83,42.55 38.1,43.81 U7.5
A20: length 38.3
  TOP w0.203: v1(31.75,43.04) 30.91,43.04 29.78,41.91 26.24,41.91 25.4,41.07 25.4,35.56 24.77,34.92 U20.30 19.35,34.92 19.18,35.1 18.2,35.1 17.62,35.69 17.62,35.72 15.24,38.1 J1.41
  BOTTOM w0.203: v1(31.75,43.04) 31.75,43.81 32.38,44.45 35.56,44.45 37.47,46.35 U7.4
A21: length 39.5
  TOP w0.203: v1(31.75,45.09) 31.11,44.45 31.11,43.82 29.61,42.32 26.41,42.32 26.41,42.32 26.07,42.32 24.99,41.24 24.99,36.42 24.13,35.56 U20.29 19.58,35.56 19.54,35.51 19.31,35.51 19.3,35.51 18.37,35.51 18.03,35.86 18.03,35.95 13.33,40.64 J1.42
  BOTTOM w0.203: v1(31.75,45.09) 33.66,45.09 37.47,48.89 U7.3
A22: length 40.7
  TOP w0.203: J1.43 17.73,36.88 18.37,36.88 18.5,37.01 19.18,37.01 19.35,36.83 U20.27 24.13,36.83 24.59,37.29 24.59,41.76 24.97,42.14 25.26,42.14 25.75,42.63 25.81,42.63 25.9,42.73 26.58,42.73 26.58,42.72 29.39,42.72 30.48,43.81 v1(30.48,45.09)
  BOTTOM w0.203: v1(30.48,45.09) 31.11,45.72 32.38,45.72 38.1,51.43 U7.2
A23: length 44
  TOP w0.203: J1.44 17.78,39.37 17.78,37.67 18.03,37.41 19.3,37.41 19.35,37.46 U20.26 23.49,37.46 24.13,38.1 24.13,42.34 24.33,42.55 25.09,42.55 25.58,43.04 25.64,43.04 25.73,43.13 26.75,43.13 26.75,43.13 29.22,43.13 29.64,43.55 29.64,44.04 v1(29.21,44.48)
  BOTTOM w0.203: v1(29.21,44.48) 29.21,45.09 29.24,45.11 29.24,45.34 29.59,45.69 30.28,45.69 30.69,46.1 30.84,46.1 31.09,46.35 32.38,46.35 U7.1
AEN/: length 44.1
  BOTTOM w0.203: J1.47 13.97,53.34 15.24,52.07 15.24,41.91 15.88,41.27 36.63,41.27 36.83,41.07 36.83,36.83 37.47,36.2 U7.8
BA0: length 105
  TOP w0.203: U16.6 v1(45.72,106.68) ; 32.26,49.07 32.93,49.07 33.11,48.89 34.29,48.89 35.56,50.16 v1(35.56,53.34) ; 32.26,49.07 32.08,48.89 U21.2 ; 32.26,49.07 32.31,49.12 34.46,49.12 34.55,49.21 35.56,48.2 35.56,33.02 33.66,31.12 U20.13 ; v1(33.66,71.75) 33.66,71.85 33.06,72.44 32.13,72.44 32.08,72.39 U19.2 ; v1(35.56,62.86) v1(35.56,66.67)
  BOTTOM w0.203: 33.88,71.75 v1(33.66,71.75) ; 33.88,71.75 35.36,71.75 35.56,71.55 v1(35.56,66.67) ; 33.88,71.75 34.9,72.77 34.9,73 35.56,73.66 41.91,73.66 43.81,75.56 45.08,75.56 45.72,76.2 v1(45.72,106.68) ; v1(35.56,53.34) v1(35.56,62.86)
BA1: length 107
  TOP w0.203: U20.14 32.08,31.75 32.26,31.57 33.48,31.57 35.13,33.22 35.13,47.17 34.9,47.4 28.8,47.4 28.57,47.62 28.57,49.33 28.78,49.53 U21.3 32.08,49.53 32.26,49.35 32.93,49.35 33.11,49.53 34.29,49.53 35.15,50.39 35.15,51.78 34.92,52.01 34.92,53.34 v1(34.29,53.98) ; U19.3 32.08,73.02 32.26,72.85 32.93,72.85 33.11,73.02 v1(34.29,73.02) v1(34.29,71.12) ; v1(34.29,62.86) v1(34.29,66.67) ; U16.7 v1(44.45,107.31)
  BOTTOM w0.203: v1(44.45,107.31) 44.45,76.2 44.22,75.97 43.64,75.97 41.74,74.07 35.39,74.07 34.98,73.66 34.92,73.66 v1(34.29,73.02) ; v1(34.29,53.98) v1(34.29,62.86) ; v1(34.29,66.67) v1(34.29,71.12)
BA2: length 108.7
  TOP w0.203: v1(34.29,52.07) 34.75,51.61 34.75,50.97 34.58,50.8 34.29,50.8 34.11,50.98 32.26,50.98 32.08,50.8 U21.5 28.57,50.8 27.94,50.16 27.94,47.62 28.57,46.99 34.09,46.99 34.29,46.79 34.52,46.79 34.72,46.58 34.72,33.6 34.52,33.4 34.29,33.4 34.09,33.2 32.26,33.2 32.08,33.02 U20.16 ; v1(35.56,73.02) v1(34.29,74.3) 33.11,74.3 33.06,74.35 32.13,74.35 32.08,74.3 U19.5 ; U16.8 v1(43.18,106.68) ; v1(36.83,62.86) v1(36.83,66.67)
  BOTTOM w0.203: v1(35.56,73.02) 36.83,71.75 v1(36.83,66.67) ; v1(34.29,74.3) 35.04,74.3 35.22,74.47 41.57,74.47 43.18,76.08 v1(43.18,106.68) ; v1(34.29,52.07) 36.63,52.07 36.83,52.27 v1(36.83,62.86)
BA3: length 80.4
  TOP w0.203: v1(33.66,35.56) 34.09,35.56 34.29,35.76 34.29,46.15 34.09,46.35 28.57,46.35 27.3,47.62 27.3,51.23 27.51,51.43 U21.6 ; U16.9 v1(41.91,107.31) ; v1(33.66,74.93) 33.48,74.75 32.26,74.75 32.08,74.93 U19.6 ; U20.17 v1(28.57,33.66)
  BOTTOM w0.203: v1(28.57,33.66) 32.08,33.66 32.26,33.48 32.93,33.48 33.66,34.2 v1(33.66,35.56) ; v1(33.66,74.93) 35.68,74.93 35.85,75.11 41.45,75.11 41.91,75.56 v1(41.91,107.31)
BD0: length 26.6
  TOP w0.203: v1(28.57,84.45) 24.97,84.45 v1(24.77,84.25) ; U16.25 v1(36.32,91.57) ; v1(28.57,79.38) U19.13
  BOTTOM w0.203: v1(28.57,84.45) 33.66,89.53 33.66,91.36 33.86,91.57 v1(36.32,91.57) ; v1(24.77,84.25) 25.2,83.82 25.2,83.62 26.01,82.8 26.01,82.3 25.81,82.09 25.81,80.19 26.62,79.38 v1(28.57,79.38)
BD1: length 20.9
  TOP w0.203: U16.24 v1(36.32,92.84) ; U19.14 29.21,80.01 v1(28.57,80.64)
  BOTTOM w0.203: v1(36.32,92.84) 33.78,92.84 33.02,92.08 33.02,89.84 27.88,84.69 27.88,83.99 28.09,83.78 28.12,82.93 28.45,82.6 28.45,81.38 28.57,81.25 v1(28.57,80.64)
BD2: length 22.5
  TOP w0.203: v1(27.74,81.28) U19.16 ; U16.23 v1(36.32,94.11)
  BOTTOM w0.203: v1(36.32,94.11) 33.78,94.11 32.61,92.94 32.61,90 29.04,86.44 28.71,86.44 27.45,85.18 27.45,84.42 27.48,83.82 27.69,83.61 27.69,82.55 27.91,82.32 27.91,81.46 v1(27.74,81.28)
BD3: length 24.2
  TOP w0.203: 37.59,95.38 v1(36.32,95.38) ; v1(27.3,81.91) U19.17
  BOTTOM w0.203: v1(36.32,95.38) 33.78,95.38 32.21,93.8 32.21,90.18 28.87,86.84 27.99,86.84 26.92,85.78 26.92,84.37 27.05,84.24 27.08,83.64 27.28,83.44 27.28,82.93 26.92,82.58 26.92,82.3 v1(27.3,81.91)
BD4: length 25.2
  TOP w0.203: v1(26.67,83.19) U19.19 ; U16.21 v1(36.32,96.65)
  BOTTOM w0.203: v1(36.32,96.65) 33.22,96.65 31.8,95.22 31.8,90.35 28.7,87.25 27.56,87.25 26.52,86.21 26.52,84.2 26.64,84.07 26.64,83.21 v1(26.67,83.19)
BD5: length 27.2
  TOP w0.203: v1(26.04,83.82) U19.20 ; U16.20 v1(36.2,97.92)
  BOTTOM w0.203: v1(36.2,97.92) 32.59,97.92 31.39,96.72 31.39,90.52 28.53,87.66 26.9,87.66 26.04,86.79 v1(26.04,83.82)
BD6: length 28.6
  TOP w0.203: U16.19 v1(36.2,99.19) ; v1(25.4,85.09) U19.22
  BOTTOM w0.203: v1(36.2,99.19) 31.95,99.19 30.99,98.22 30.99,90.69 28.36,88.06 26.47,88.06 25.4,87 v1(25.4,85.09)
BD7: length 32.4
  TOP w0.203: 37.59,100.46 v1(36.32,100.46) ; v1(24.77,85.72) U19.23
  BOTTOM w0.203: v1(36.32,100.46) 31.32,100.46 30.58,99.72 30.58,91.25 30.14,90.8 29.41,90.8 28.37,89.76 28.37,88.65 28.19,88.47 25.17,88.47 24.13,87.43 24.13,85.93 24.33,85.72 v1(24.77,85.72)
BD8: length 52.2
  TOP w0.203: U20.2 36.63,24.13 37.01,24.51 37.01,25.06 38.73,26.78 38.73,29.5 38.86,29.63 38.86,56.73 38.73,56.86 38.73,58.94 36.83,60.84 36.83,62.03 36.63,62.23 U21.23
BD9: length 50.4
  TOP w0.203: U21.22 32.08,61.59 32.26,61.77 36.02,61.77 36.2,61.59 36.2,60.84 38.1,58.94 38.1,56.92 38.46,56.56 38.46,29.8 38.1,29.44 38.1,26.73 35.96,24.59 32.26,24.59 32.08,24.77 U20.3
BD10: length 47.6
  TOP w0.203: U21.20 32.08,60.32 32.26,60.15 36.31,60.15 37.54,58.92 37.54,56.9 38.05,56.39 38.05,29.97 37.54,29.46 37.54,26.95 36.63,26.03 33.11,26.03 32.93,26.21 32.26,26.21 32.08,26.03 U20.5
BD11: length 45.5
  TOP w0.203: U21.19 32.08,59.69 32.13,59.74 33.06,59.74 33.11,59.69 35.99,59.69 37.14,58.54 37.14,56.73 37.64,56.22 37.64,30.14 37.14,29.63 37.14,27.82 35.99,26.67 33.11,26.67 33.06,26.62 32.13,26.62 32.08,26.67 U20.6
BD12: length 41.8
  TOP w0.203: U20.8 32.08,27.94 32.26,28.12 32.93,28.12 33.11,27.94 34.92,27.94 36.73,29.75 36.73,29.8 37.24,30.31 37.24,56.05 36.73,56.56 36.73,57.05 35.36,58.42 35.1,58.42 34.92,58.24 32.26,58.24 32.08,58.42 U21.17
BD13: length 39.8
  TOP w0.203: U21.16 32.08,57.78 32.13,57.84 33.06,57.84 33.11,57.78 34.92,57.78 36.83,55.88 36.83,30.48 34.92,28.58 33.11,28.58 33.06,28.52 32.13,28.52 32.08,28.58 30.48,28.58
BD14: length 36.6
  TOP w0.203: U20.11 32.08,29.84 32.26,30.02 32.93,30.02 33.11,29.84 34.72,29.84 35.92,31.04 35.92,32.22 36.37,32.68 36.37,54.43 34.29,56.52 33.11,56.52 32.93,56.34 32.26,56.34 32.08,56.52 U21.14
BD15: length 33.7
  TOP w0.203: U21.13 33.66,55.88 35.97,53.57 35.97,32.85 35.51,32.4 35.51,32.34 33.66,30.48 U20.12
BRD/: length 93.2
  TOP w0.203: U7.15 50.6,31.12 50.8,31.32 50.8,37.46 51.82,38.48 51.82,38.76 51.46,39.12 51.46,39.62 52.07,40.23 v1(52.07,41.27) ; U16.73 60.45,106.81 60.33,106.68 v1(58.42,106.68) ; v1(58.42,64.77) 58.42,63.91 57.38,62.86 52.27,62.86 52.07,62.66 v1(52.07,59.05) ; v1(58.42,87) v1(58.42,89.53)
  BOTTOM w0.203: v1(58.42,89.53) v1(58.42,106.68) ; v1(58.42,64.77) v1(58.42,87) ; v1(52.07,41.27) v1(52.07,59.05)
BRESET: length 94.6
  TOP w0.203: U16.12 41.07,108.08 41.27,107.87 41.27,106.62 41.85,106.05 v1(46.99,106.05)
  BOTTOM w0.203: U7.14 49.33,28.58 49.53,28.78 49.53,44.88 49.33,45.09 45.92,45.09 45.72,45.29 45.72,55.04 45.92,55.24 46.36,55.24 46.99,55.88 v1(46.99,106.05)
BWR/: length 66.3
  TOP w0.203: v1(64.77,82.55) 66.42,82.55 66.55,82.68 ; U7.16 49.96,33.66 50.17,33.86 50.17,38.91 51.44,40.18 v1(51.44,41.91) ; v1(51.44,57.78) 52.7,57.78 52.85,57.93 52.85,62.03 53.05,62.23 58.42,62.23 59.05,62.86 v1(59.05,64.14)
  BOTTOM w0.203: v1(59.05,64.14) 59.05,82.35 59.26,82.55 v1(64.77,82.55) ; v1(51.44,41.91) v1(51.44,57.78)
D0: length 46.5
  TOP w0.203: v1(25.4,82.55) 22.23,85.72 U19.26 12.93,85.72 12.47,85.27 7.44,85.27 J1.28 ; v1(19.68,62.23) U21.26 ; v1(22.23,66.67) v1(22.23,64.14)
  BOTTOM w0.203: v1(25.4,82.55) 25.4,72.33 21.82,68.75 21.82,68.41 22.23,68 v1(22.23,66.67) ; v1(19.68,62.23) 19.68,63.5 20.32,64.14 v1(22.23,64.14)
D1: length 47.4
  TOP w0.203: v1(20.95,63.5) 20.95,65.46 21.39,65.9 21.39,66.24 v1(20.95,66.67) ; v1(24.77,82.55) 22.23,85.09 U19.27 19.35,85.09 19.18,85.27 17.58,85.27 15.04,82.73 7.44,82.73 J1.27 ; v1(22.86,61.59) U21.27
  BOTTOM w0.203: v1(24.77,82.55) 24.77,72.27 21.41,68.92 21.41,68.24 21.59,68.06 21.59,67.31 v1(20.95,66.67) ; v1(20.95,63.5) 22.23,63.5 22.86,62.86 v1(22.86,61.59)
D2: length 54.8
  TOP w0.203: U21.29 19.35,60.32 18.92,59.89 18.21,59.89 v1(17.78,60.32) ; v1(19.05,64.14) 20.7,65.79 20.7,66.07 20.35,66.42 20.35,67.39 20.73,67.77 20.73,68.15 21.16,68.58 v1(22.23,68.58) ; v1(27.94,78.74) 27.03,79.65 27.03,79.85 26.67,80.21 26.67,81.28 26.04,81.91 24.54,81.91 24.16,82.3 24.16,82.58 22.92,83.82 U19.29 19.35,83.82 19.18,83.64 18.5,83.64 18.32,83.82 17.54,83.82 14.58,80.86 14.58,80.39 14.22,80.04 7.59,80.04 J1.26
  BOTTOM w0.203: v1(27.94,78.74) 27.3,78.74 27.28,78.71 27.05,78.71 26.06,77.72 26.06,77.5 26.04,77.47 26.04,72.39 v1(22.23,68.58) ; v1(19.05,64.14) 17.78,62.86 v1(17.78,60.32)
D3: length 55.1
  TOP w0.203: v1(23.49,59.69) U21.30 ; J1.25 7.44,77.65 12.47,77.65 13.31,78.49 13.31,78.66 14.28,79.63 14.39,79.63 14.99,80.22 14.99,80.69 17.53,83.24 19.53,83.24 19.58,83.19 U19.30 22.69,83.19 24.59,81.28 25.83,81.28 26.04,81.08 26.04,80.47 26.21,80.29 26.21,80.09 26.62,79.68 26.62,79.43 27.3,78.74 v1(27.3,78.11) ; v1(29.21,66.67) v1(29.21,64.14)
  BOTTOM w0.203: v1(29.21,64.14) 23.7,64.14 23.49,63.93 v1(23.49,59.69) ; v1(27.3,78.11) 27.3,77.47 26.67,76.83 26.67,70.48 27.34,69.82 27.64,69.82 29.21,68.25 v1(29.21,66.67)
D4: length 61
  TOP w0.203: v1(30.48,64.14) v1(30.48,66.67) ; v1(24.13,58.42) U21.32 ; v1(28.57,77.47) 28.12,77.02 27.65,77.02 27.16,77.5 27.05,77.5 26.7,77.85 26.7,78.6 26.21,79.08 26.21,79.51 25.81,79.92 25.81,80.12 25.58,80.35 25.58,80.62 25.37,80.82 24.48,80.82 23.38,81.91 U19.32 19.35,81.91 19.18,81.74 18.5,81.74 18.32,81.91 17.85,81.91 16.96,81.03 16.72,81.03 16.13,80.43 16.13,79.96 15.56,79.39 15.26,79.39 14.6,78.74 14.17,78.74 13.97,78.54 13.97,75.77 13.13,74.93 10.79,74.93 9.52,76.2 J1.24
  BOTTOM w0.203: v1(28.57,77.47) 28.57,76.83 28.55,76.81 28.32,76.81 27.97,76.45 27.97,76.23 27.3,75.56 27.3,74.81 27.21,74.72 27.21,73.87 27.3,73.78 27.3,70.48 27.57,70.22 27.81,70.22 29.84,68.19 29.84,67.31 v1(30.48,66.67) ; v1(30.48,64.14) 29.84,63.5 24.33,63.5 24.13,63.3 v1(24.13,58.42)
D5: length 62.3
  TOP w0.203: v1(31.75,64.14) v1(31.75,66.67) ; J1.23 10.16,73.66 10.34,73.48 10.34,73.21 11.15,72.39 12.29,72.39 14.43,74.52 14.43,77.93 15.49,78.99 15.73,78.99 16.54,79.79 16.54,80.26 16.89,80.62 17.13,80.62 17.84,81.33 19.3,81.33 19.35,81.28 U19.33 23.44,81.28 24.31,80.42 24.94,80.42 25.4,79.95 25.4,79.75 25.81,79.34 25.81,78.91 26.29,78.43 26.29,77.68 26.88,77.09 26.99,77.09 27.36,76.73 27.88,76.2 v1(28.57,76.2) ; v1(22.86,57.78) U21.33
  BOTTOM w0.203: v1(31.75,66.67) 31.29,66.67 31.09,66.88 31.09,66.93 30.48,67.54 30.48,68.13 27.94,70.67 27.94,73.72 27.62,74.04 27.62,74.55 27.94,74.87 27.94,74.93 28.57,75.56 v1(28.57,76.2) ; v1(31.75,64.14) 31.14,63.53 30.48,63.53 29.82,62.86 24.97,62.86 24.77,62.66 24.77,57.99 24.56,57.78 v1(22.86,57.78)
D6: length 132.6
  TOP w0.203: v1(28.57,73.02) 28.84,73.29 28.84,74.55 25.15,78.25 25.15,79.16 24.3,80.01 U19.35 19.35,80.01 19.18,79.83 18.73,79.83 18.41,79.51 17.51,79.51 17.4,79.4 17.17,79.4 14.83,77.06 14.83,72.39 12.47,70.03 7.44,70.03 J1.22 ; v1(23.49,31.75) 25.4,29.84 25.4,26.67 22.86,24.13 U20.47 19.25,24.13 19.05,23.93 19.05,19.25 18.85,19.05 10.36,19.05 10.16,19.25 10.16,21.39 9.96,21.59 4.01,21.59 3.81,21.79 3.81,25.2 4.01,25.4 J1.4 ; v1(23.49,39.37) 23.49,42.34 23.29,42.55 22.43,42.55 22.23,42.75 v1(22.23,45.09) ; U21.35 v1(23.49,56.52) 24.56,56.52 24.77,56.72 24.77,63.3 24.97,63.5 30.91,63.5 31.11,63.7 31.11,67.95 27.3,71.75 v1(28.57,71.75)
  BOTTOM w0.203: v1(28.57,73.02) v1(28.57,71.75) ; v1(22.23,45.09) 22.23,46.99 23.49,48.26 23.49,54.67 22.45,55.71 22.45,56.08 22.89,56.52 v1(23.49,56.52) ; v1(23.49,31.75) v1(23.49,39.37)
D7: length 64.9
  TOP w0.203: J1.21 7.44,67.49 12.24,67.49 15.24,70.48 15.24,76.2 18.15,79.11 18.58,79.11 18.85,79.38 U19.36 22.86,79.38 23.09,79.6 24.13,79.6 24.74,78.99 24.74,77.78 v1(28.23,74.3) ; v1(33.02,64.14) v1(33.02,66.67) ; v1(24.13,55.88) U21.36
  BOTTOM w0.203: v1(28.23,74.3) 31.19,71.34 31.19,67.47 31.37,67.28 32.41,67.28 v1(33.02,66.67) ; v1(24.13,55.88) 24.77,55.88 25.4,56.52 25.4,62.03 25.6,62.23 29.82,62.23 30.45,62.86 31.75,62.86 v1(33.02,64.14)
D9: length 16.6
  TOP w0.203: v1(18.41,24.13) 18.87,24.59 19.18,24.59 19.35,24.77 U20.46
  BOTTOM w0.203: J1.5 10.16,24.13 v1(18.41,24.13)
D10: length 13.8
  BOTTOM w0.203: J1.6 10.16,26.67 13.33,26.67 14.6,25.4 17.14,25.4 v1(17.78,26.03)
D11: length 17.5
  TOP w0.203: v1(16.51,26.67) 18.32,26.67 18.5,26.49 19.18,26.49 19.35,26.67 U20.43
  BOTTOM w0.203: v1(16.51,26.67) 14.6,26.67 12.06,29.21 10.16,29.21 J1.7
D12: length 19
  TOP w0.203: v1(15.88,27.94) 18.32,27.94 18.37,27.99 19.3,27.99 19.35,27.94 U20.41
  BOTTOM w0.203: J1.8 10.16,31.75 13.33,31.75 13.97,31.12 13.97,29.21 15.24,27.94 v1(15.88,27.94)
D13: length 21.2
  TOP w0.203: 21.08,28.58 19.35,28.58 19.18,28.4 18.5,28.4 18.32,28.58 v1(17.14,28.58)
  BOTTOM w0.203: J1.9 8.69,38.1 8.89,37.9 8.89,36.2 10.97,34.11 12.88,34.11 15.88,31.12 15.88,28.78 16.08,28.58 v1(17.14,28.58)
D14: length 22.2
  TOP w0.203: U20.38 19.35,29.84 19.18,30.02 18.5,30.02 18.32,29.84 v1(17.14,29.84)
  BOTTOM w0.203: J1.10 9.32,40.64 9.52,40.44 9.52,38.1 10.97,36.65 12.88,36.65 17.14,32.38 v1(17.14,29.84)
D15: length 24.6
  TOP w0.203: v1(18.39,30.62) 19,30.62 19.14,30.48 U20.37
  BOTTOM w0.203: J1.11 9.52,43.18 10.16,42.55 10.16,39.57 10.36,39.37 13.97,39.37 14.6,38.73 14.6,35.5 17.55,32.56 17.55,30.85 17.78,30.62 v1(18.39,30.62)
DDIR: length 37.4
  TOP w0.203: 28.57,63.07 28.78,62.86 U21.24 ; U7.19 46.36,41.27 45.22,40.14 45.22,25.83 45.72,25.33 45.72,24.13 44.06,22.47 40.09,22.47 39.07,23.49 U20.1
DEN/: length 44.7
  TOP w0.203: v1(38.1,22.86) 28.78,22.86 28.57,23.06 28.57,23.29 28.37,23.49 U20.48
  BOTTOM w0.203: U7.20 45.92,43.81 45.72,43.61 45.72,30.48 43.81,28.58 42.75,28.58 41.05,26.87 41.05,25.6 40.71,25.27 39.6,25.27 39.45,25.12 39.29,25.12 38.1,23.93 v1(38.1,22.86)
FPGA/: length 77.2
  TOP w0.203: v1(50.8,84.45) 50.04,85.22 U16.30 ; v1(56.52,64.77) v1(50.8,64.77) ; U7.17 46.56,36.2 46.36,36.4 46.36,39.37 47.22,40.23 48.06,40.23 49.53,41.71 49.53,46.15 49.73,46.35 v1(50.8,46.35)
  BOTTOM w0.203: v1(50.8,64.77) v1(50.8,46.35) ; v1(56.52,64.77) 56.52,84.25 56.31,84.45 v1(50.8,84.45)
GAIN: length 112.6
  TOP w0.203: v1(50.8,87) 50.04,87.76 U16.28 ; v1(101.6,38.1) 101.6,37.22 101.47,37.09 101.47,36.18 102.1,35.56 U5.6
  BOTTOM w0.203: v1(50.8,87) 57.58,87 57.78,86.79 57.78,64.14 60.96,60.96 67.94,60.96 69.22,59.69 69.22,42.11 69.42,41.91 90.17,41.91 92.08,40 100.97,40 101.6,39.37 v1(101.6,38.1)
HS/: length 74.8
  TOP w0.203: v1(50.17,41.27) U7.18 ; v1(50.8,85.72) 50.04,86.49 U16.29 ; v1(57.15,63.5) v1(50.17,63.5)
  BOTTOM w0.203: v1(57.15,63.5) 57.15,85.52 56.95,85.72 v1(50.8,85.72) ; v1(50.17,63.5) v1(50.17,41.27)
MCLK: length 46.2
  TOP w0.203: v1(36.2,83.82) 37.47,83.82 U16.31 ; v1(37.47,72.39) v1(37.47,76.2)
  BOTTOM w0.203: v1(37.47,72.39) 37.47,66.24 37.26,66.04 J1.52 ; v1(37.47,76.2) 37.47,81.08 37.26,81.28 36.4,81.28 36.2,81.48 v1(36.2,83.82)
MRD/: length 44.1
  BOTTOM w0.203: U7.9 36.83,33.66 36.2,34.29 36.2,40.44 35.99,40.64 15.88,40.64 14.6,41.91 14.6,50.16 13.97,50.8 J1.46
